# Altium PCB WPT Round 2 RX Layout.PcbDoc (part 1 of 2)
Units mm, origin at the board's own origin, x right, y up, seen from the top; angles counter-clockwise.
Board outline 85 x 80 mm, 4 copper layers (Top Layer, Ground 1, Ground 2, Bottom Layer), stack 0.603 mm thick; 127 components, 46 nets, 302 pads, 216 vias.
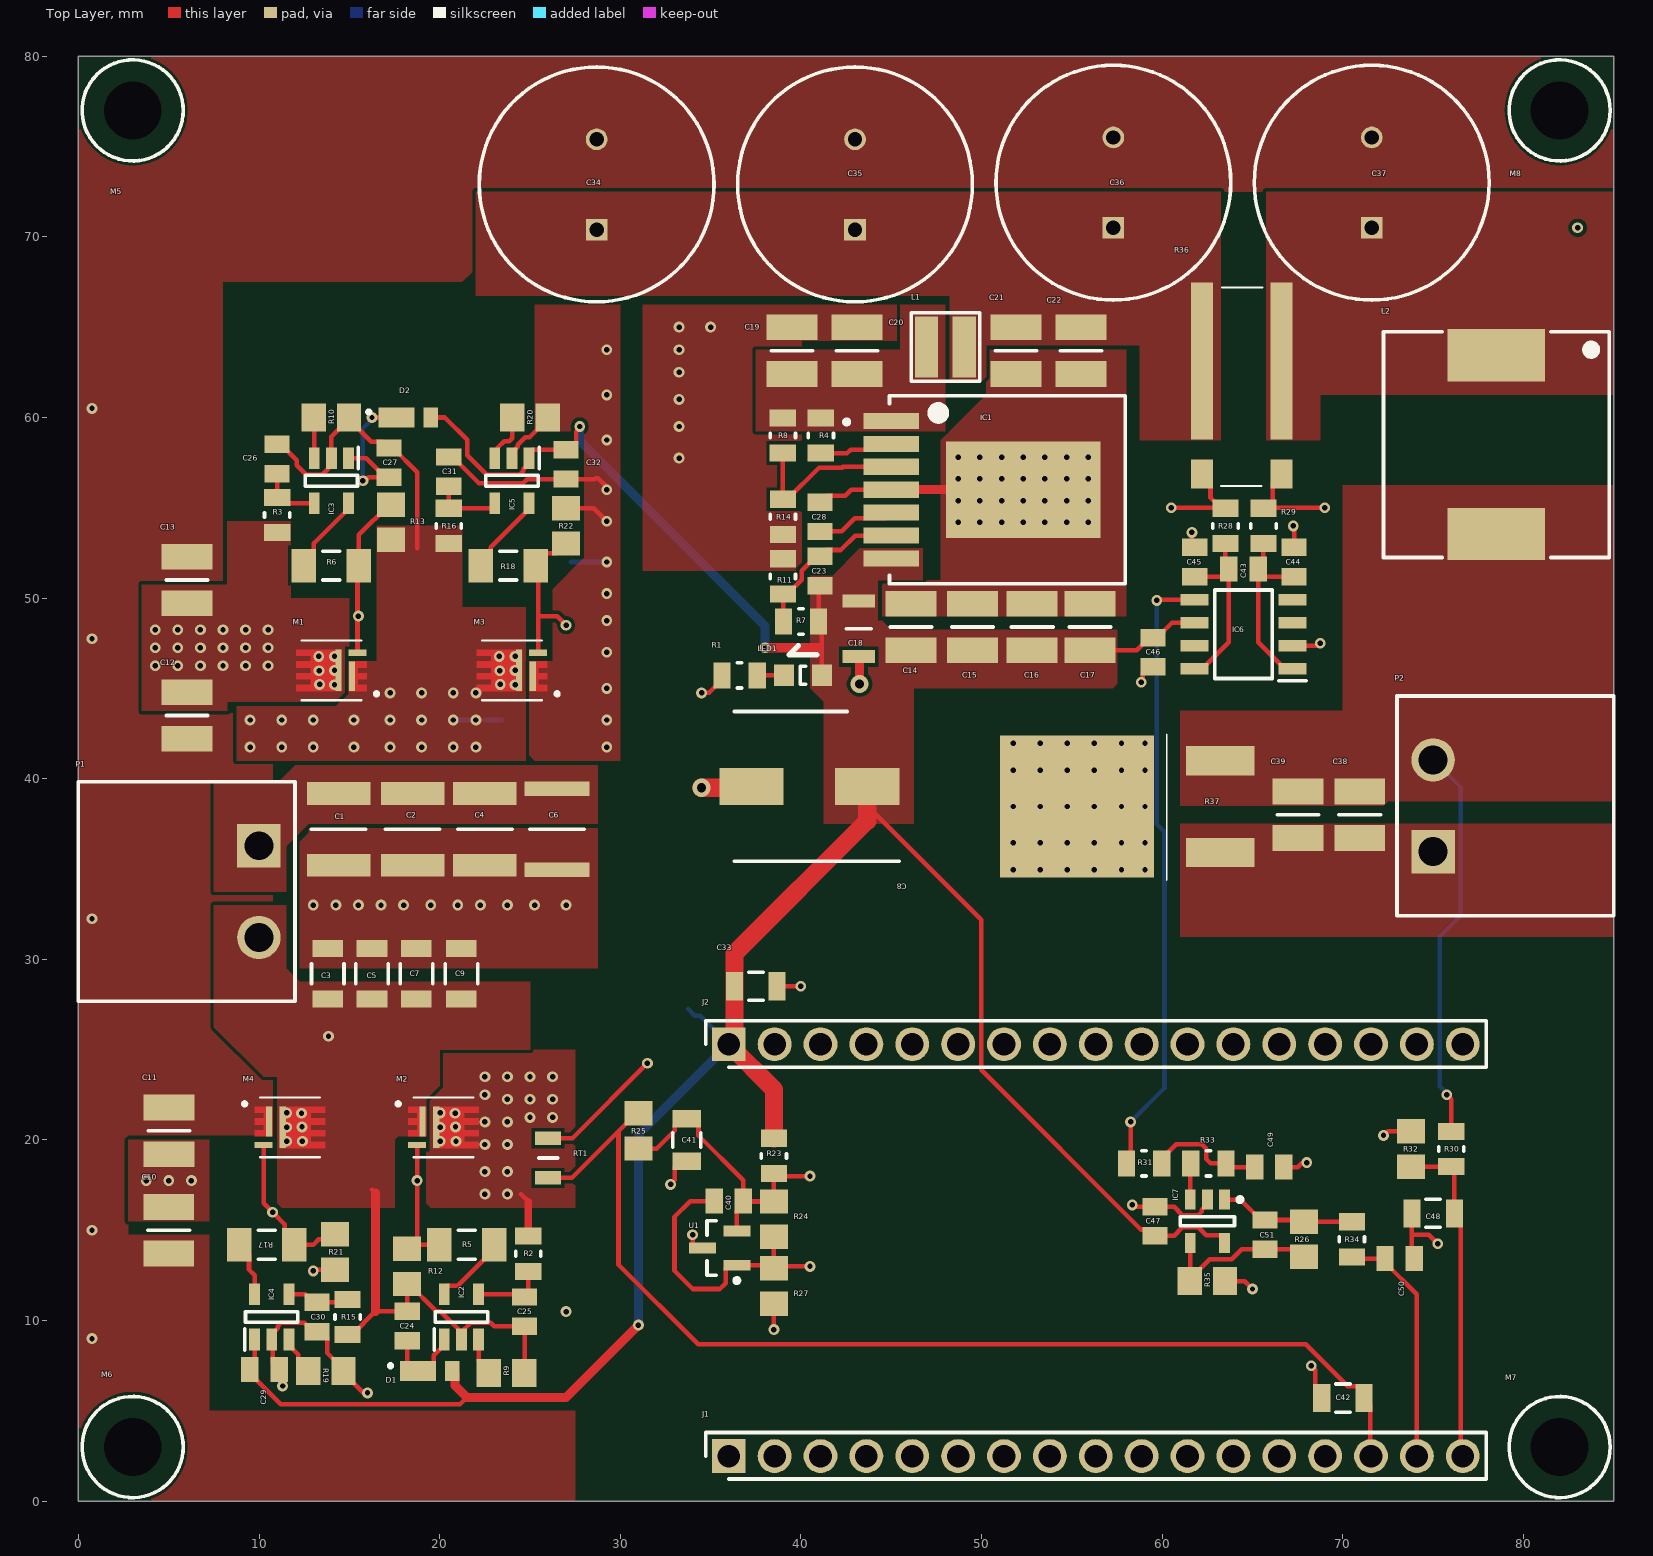
[diagram p0: Top Layer view]
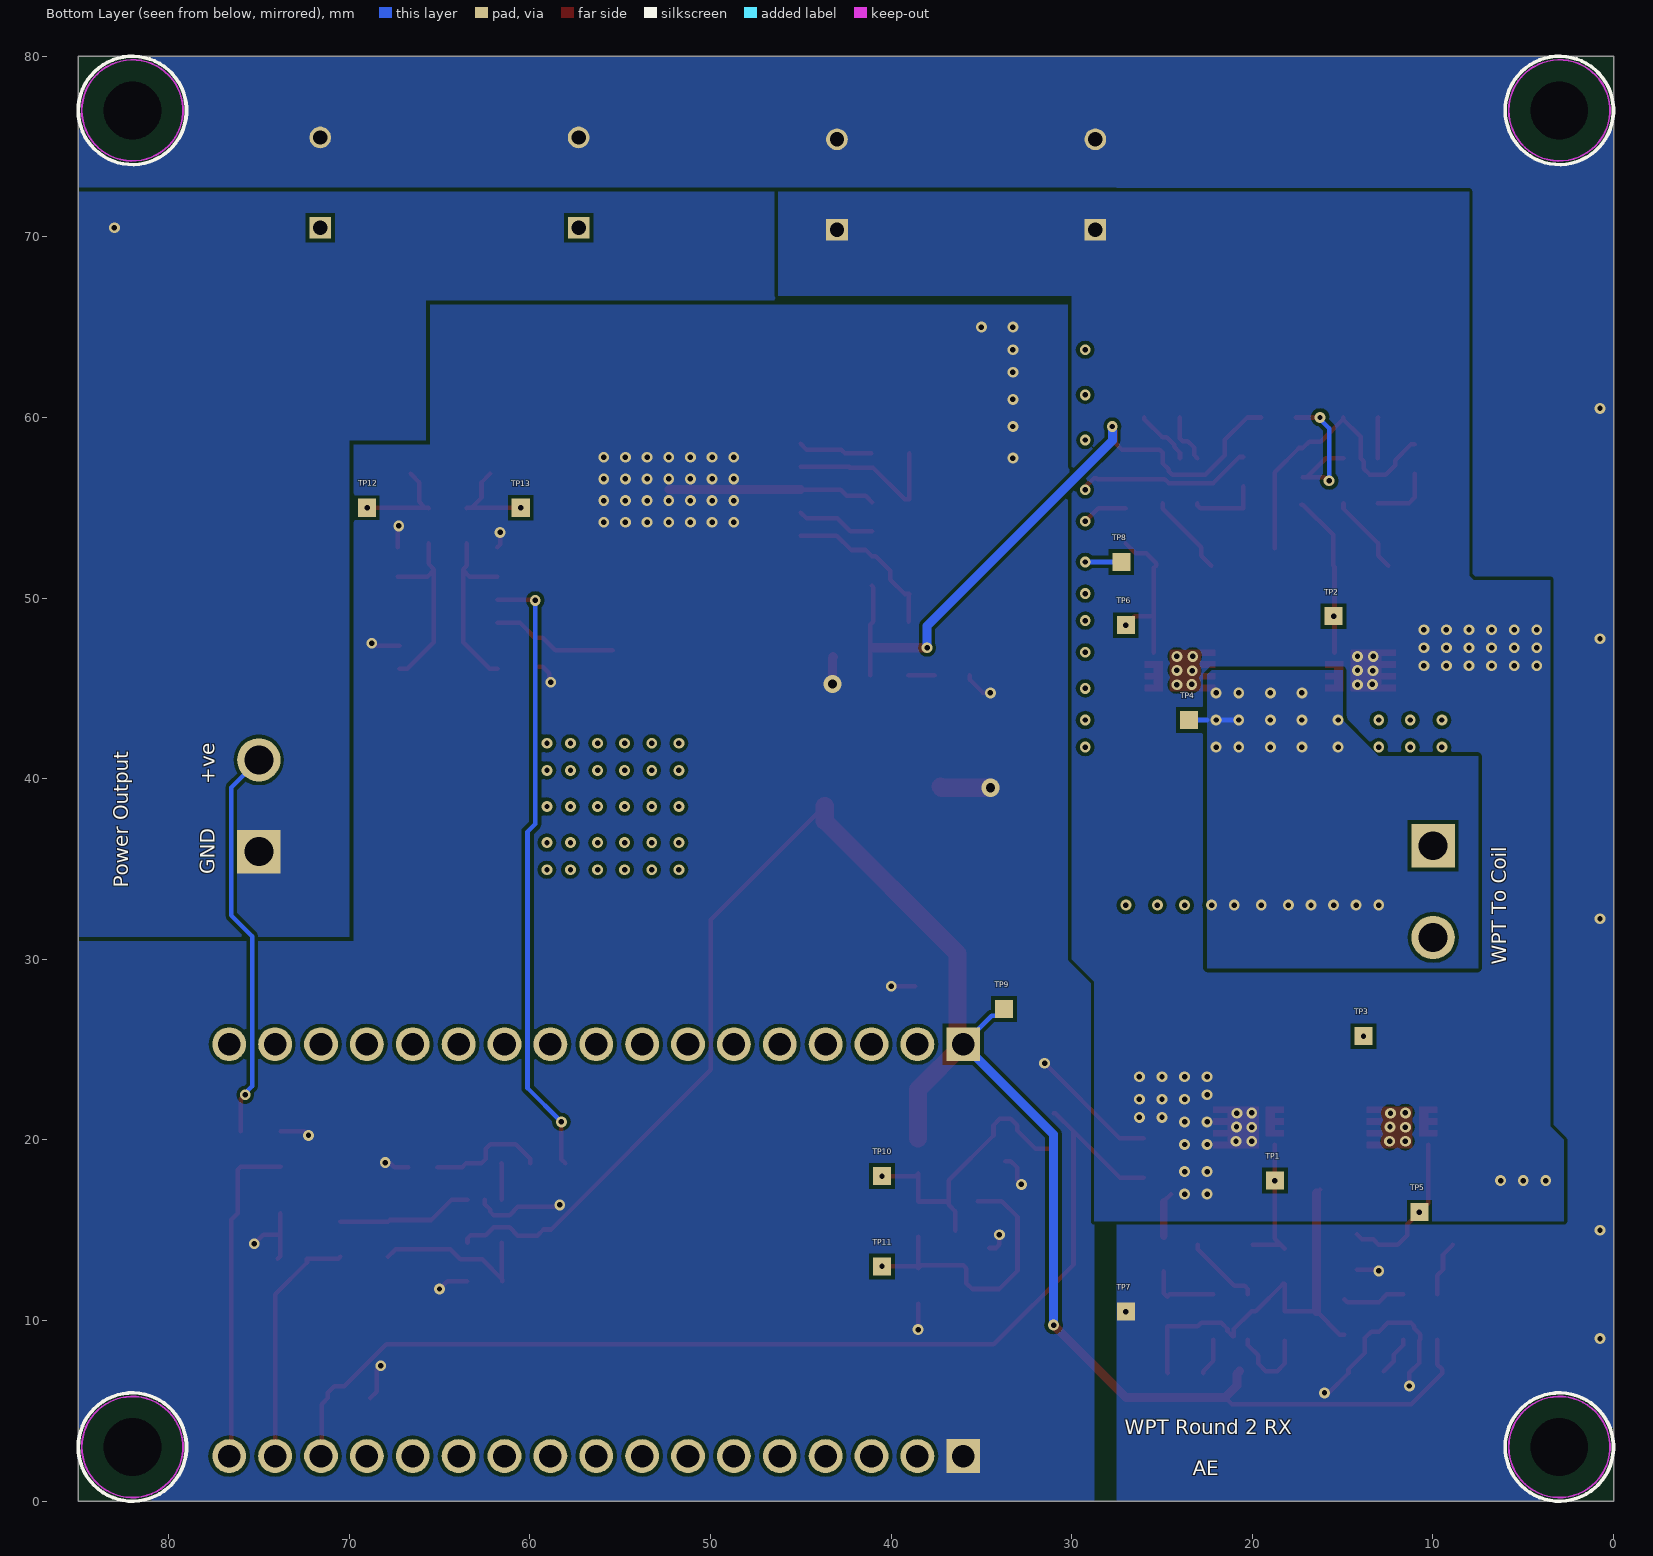
[diagram p1: Bottom Layer view, seen from below]
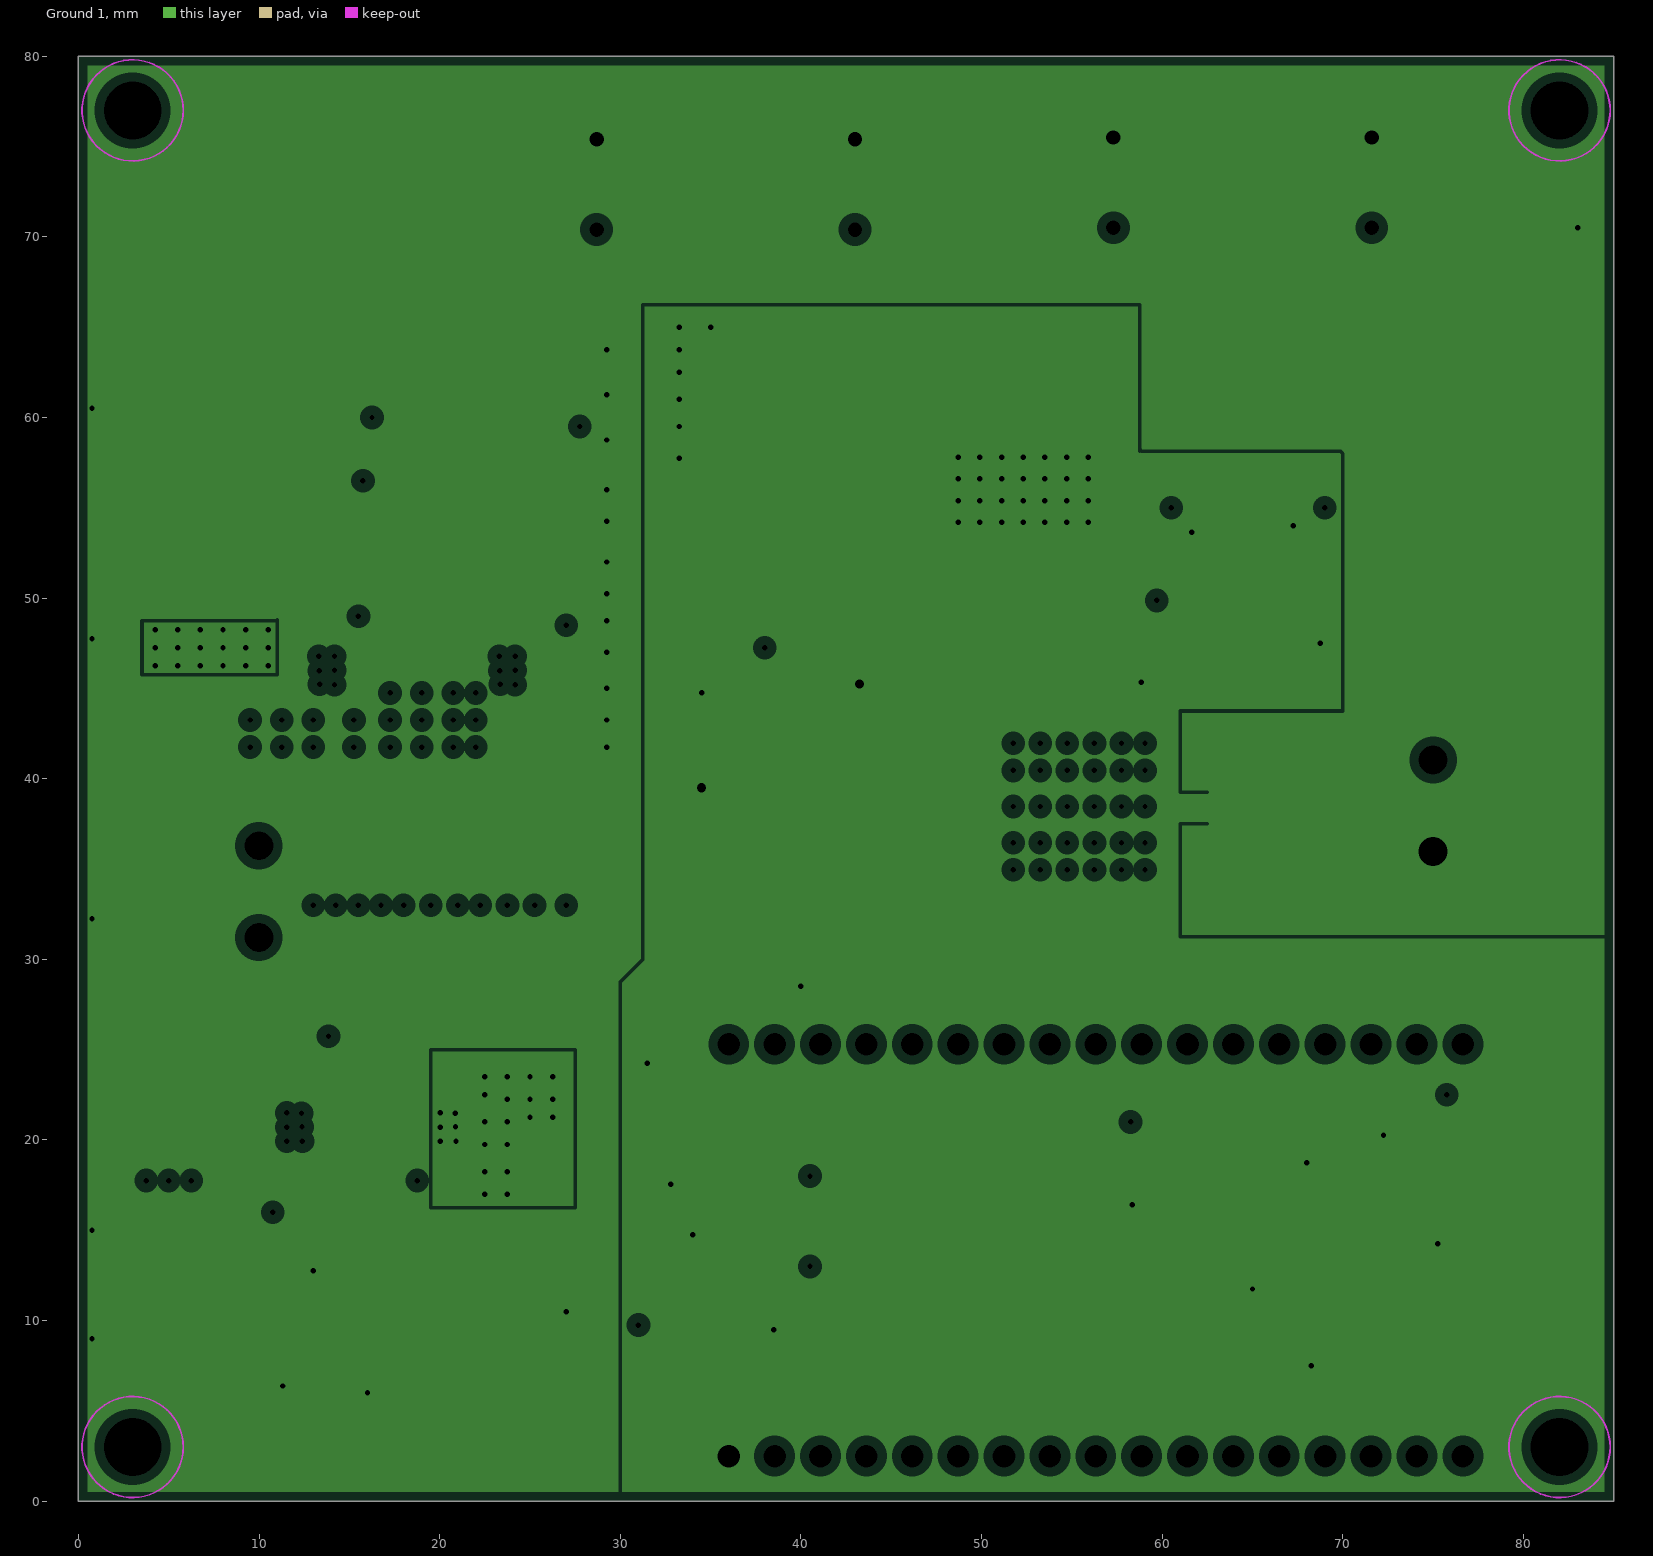
[diagram p2: Ground 1, clearances drawn from the general rule]
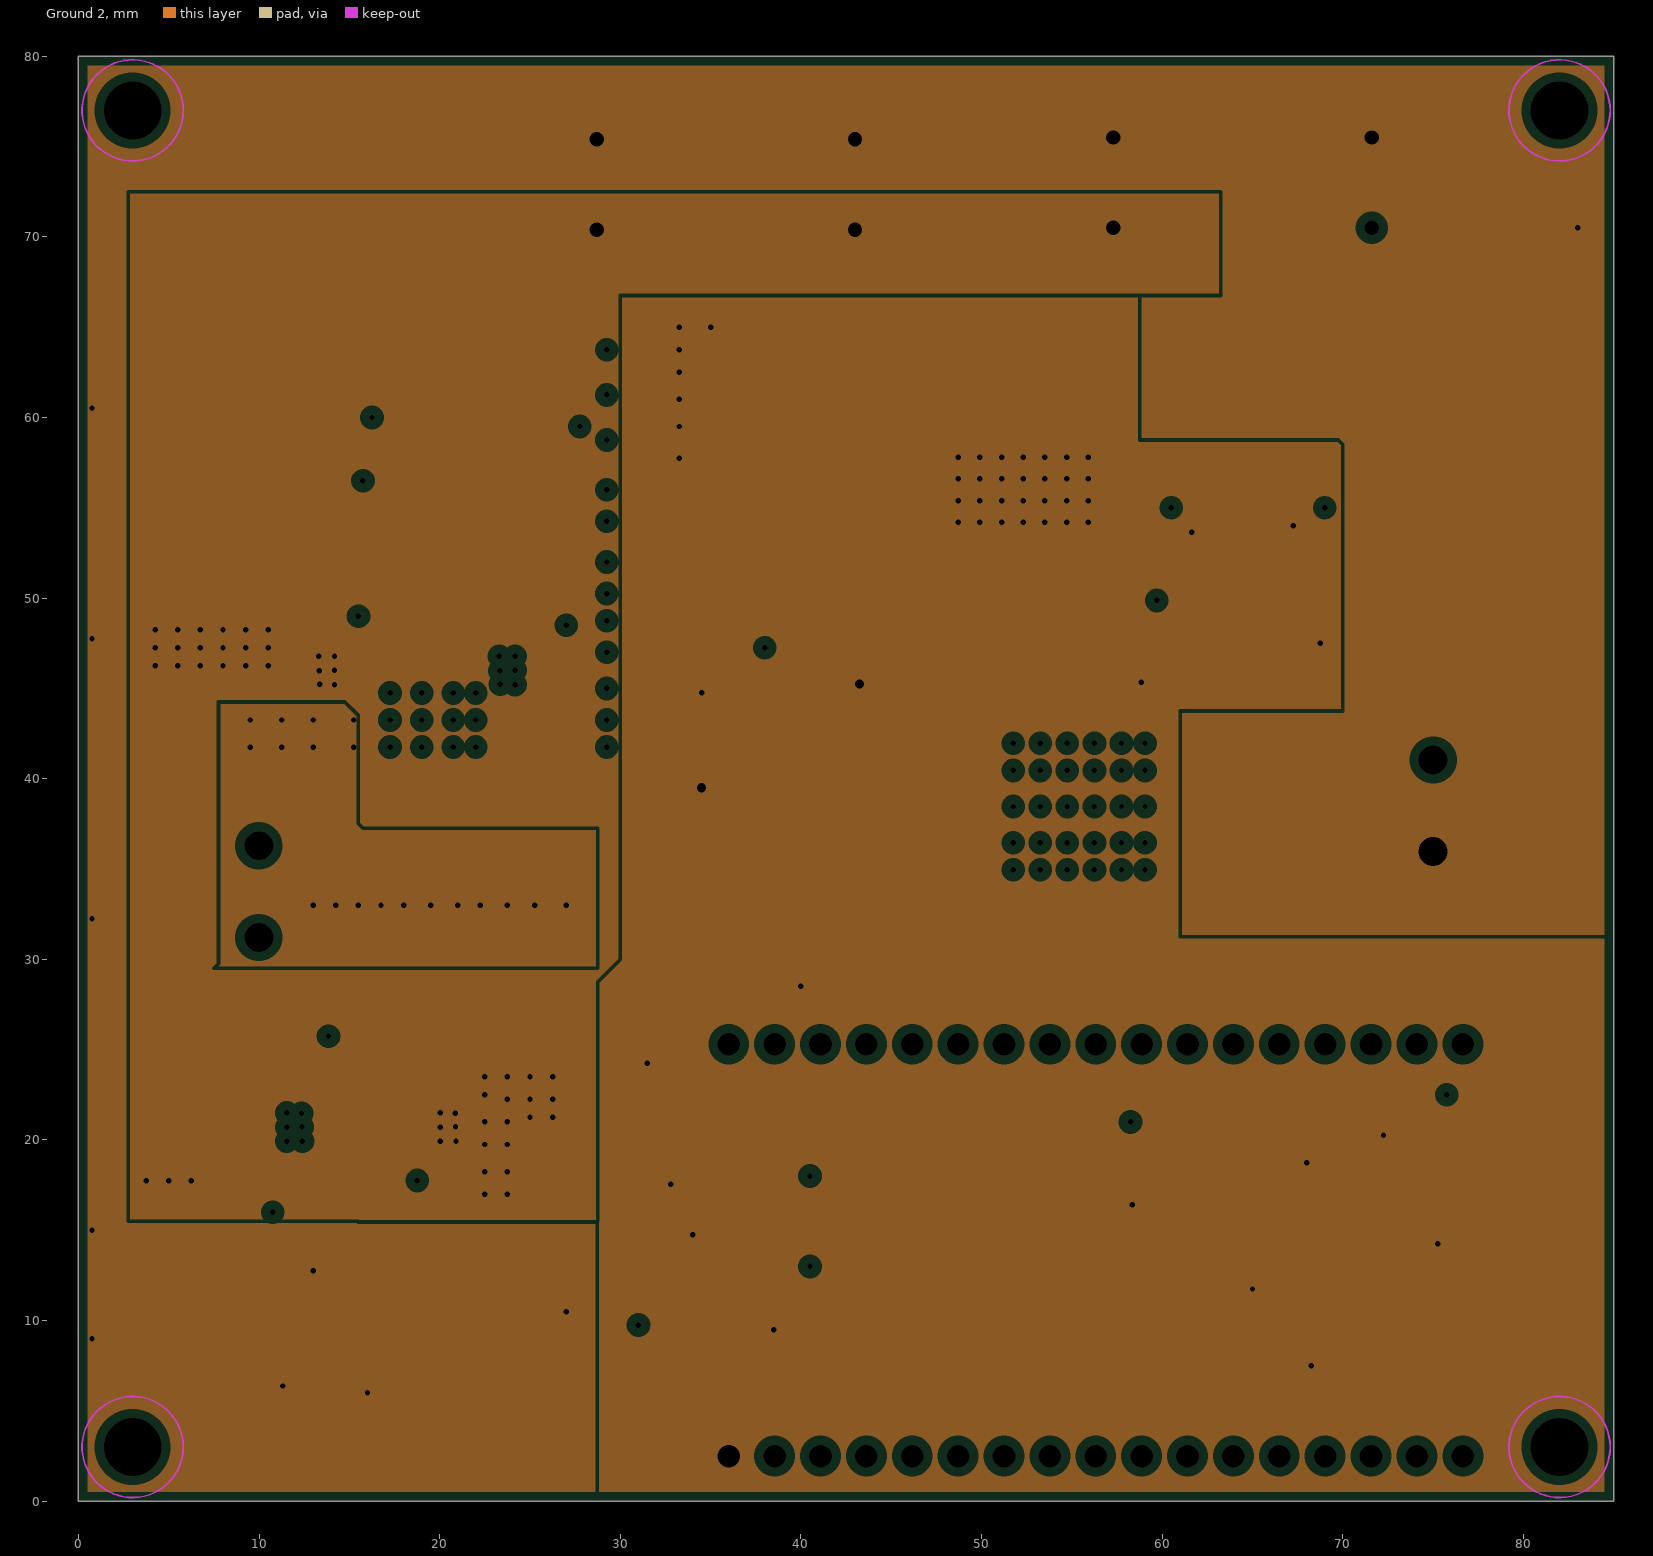
[diagram p3: Ground 2, clearances drawn from the general rule]
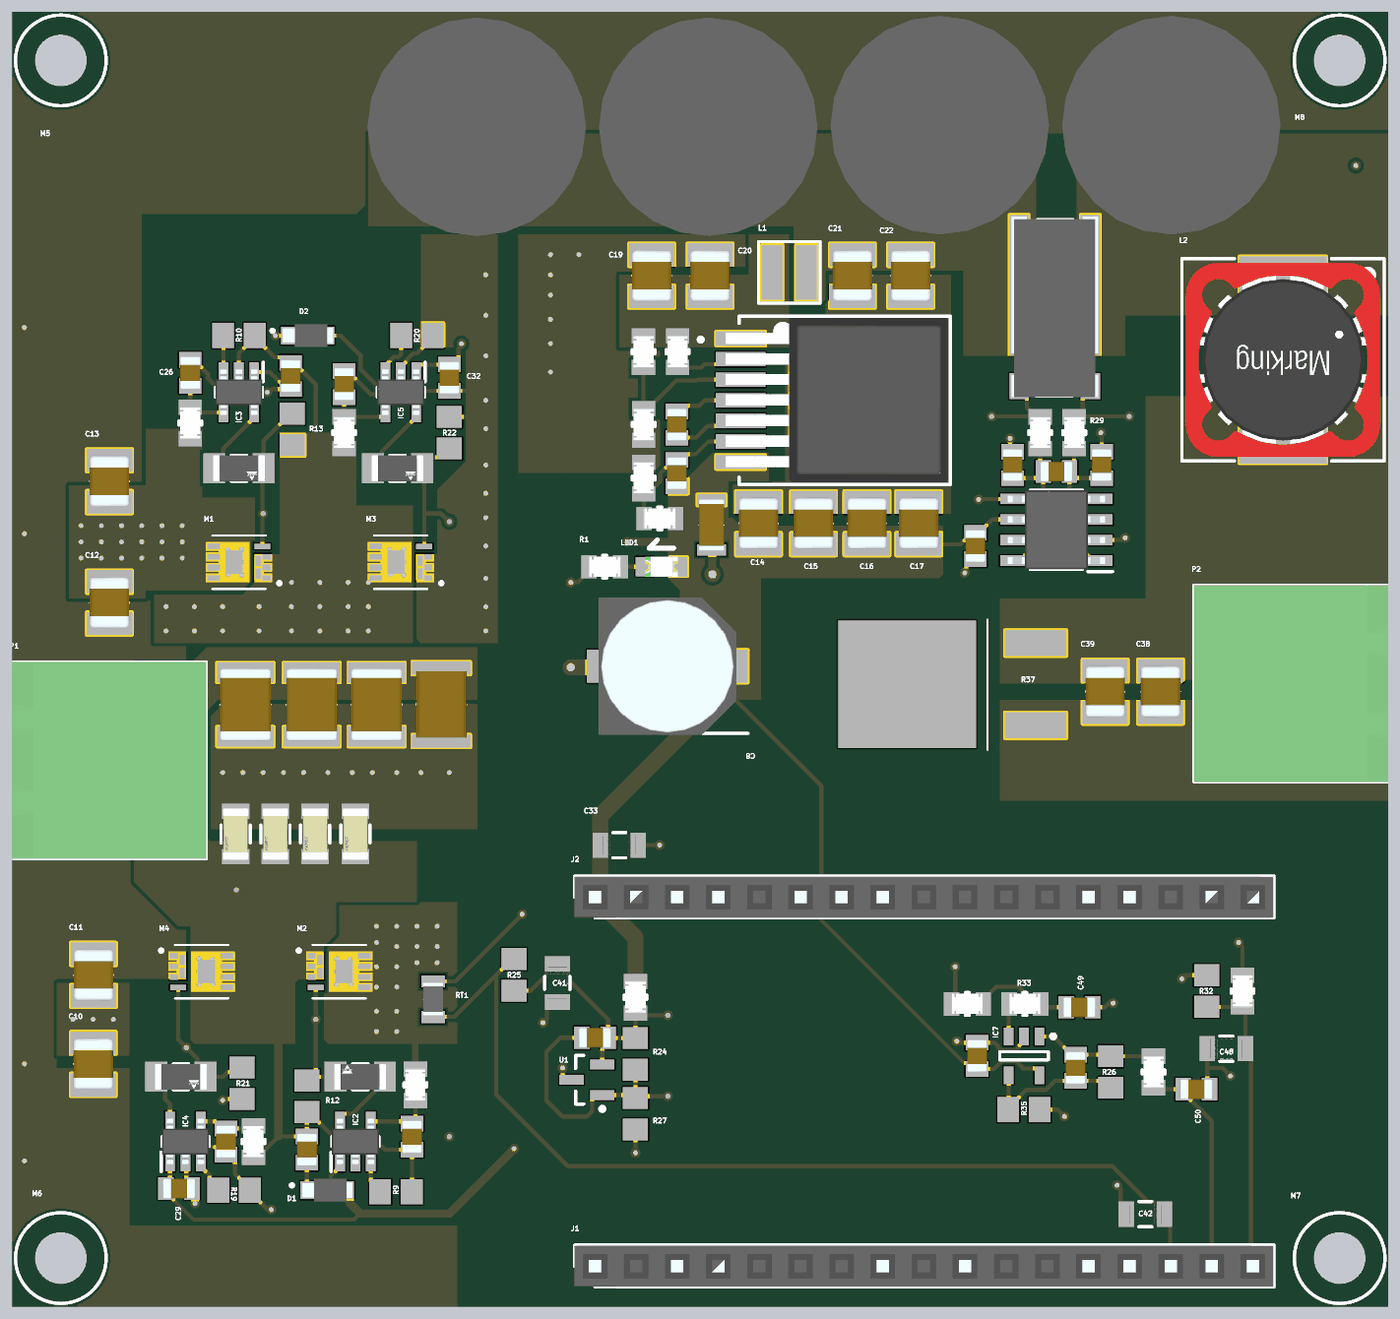
[diagram p4: 3D render of the assembled board from above, using the file's embedded part models]

## Layer stack, top to bottom
Top Solder: solder mask 0.0102, Solder Resist, Dk 3.5
Top Layer: signal copper 0.0356
Dielectric 2: prepreg 0.0711, PP-006, Dk 4.1
Ground 1: plane copper 0.035, net (Multiple Nets)
Dielectric 1: dielectric 0.32, FR-4, Dk 4.8
Ground 2: plane copper 0.035, net (Multiple Nets)
Dielectric 3: prepreg 0.0711, PP-006, Dk 4.1
Bottom Layer: signal copper 0.0356
Bottom Solder: solder mask 0.0102, Solder Resist, Dk 3.5

## Board outline
0,80 85,80 85,0 0,0

## Design rules (kind name [scope] priority, off if disabled: settings)
Clearance [All] p1: gap=0.2 ignorepadtopadclearanceinfootprint=TRUE
Height [All] p1: minheight=0 maxheight=50 prefheight=12.7
HoleSize [All] p1: absolutevalues=TRUE maxlimit=10 minlimit=0.025 maxpercent=80.000 minpercent=20.000
MinimumSolderMaskSliver [All] p1: minsoldermaskwidth=0.1
PlaneClearance [All] p1: clearance=0.508
PlaneConnect [All] p1: planeconnectstyle=Direct reliefexpansion=0.508 reliefentries=4 reliefconductorwidth=0.254 reliefairgap=0.254
PolygonConnect [All] p1: connectstyle=Direct reliefconductorwidth=0.254 reliefentries=4 polygonreliefangle="90 Angle" airgapwidth=0.254
RoutingVias [All] p1: holewidth=0.3 width=0.6 viastyle="Through Hole" minholewidth=0.05 minwidth=0.1 maxholewidth=0.711 maxwidth=1.27
SilkToSilkClearance [All] p1: silktosilkclearance=0.1
SilkToSolderMaskClearance [IsPad] p1: minsilkscreentomaskgap=0.1 clearancetoexposedcopper=TRUE
SolderMaskExpansion [All] p1: expansion=0.102 istentingtop=FALSE
Width [All] p1: maxlimit=10 minlimit=0.254 preferedwidth=0.254
23 further rules are at their usual default settings.

## Classes and differential pairs
net class Power: Vout

## Components (designator, comment, footprint, x,y, rotation, side; value= is the part's Value field where it differs from the comment)
C1 "100nF/250V" CAPC4532X220N 14.4,37.2 r270 top
C2 "100nF/250V" CAPC4532X220N 18.5,37.2 r270 top
C3 "470pF/200V" FP-C1206C-EB-MFG 13.8,29.2 r90 top value="470 pF"
C4 "100nF/250V" CAPC4532X220N 22.5,37.2 r270 top
C5 "470pF/200V" FP-C1206C-EB-MFG 16.254,29.2 r90 top value="470 pF"
C6 "47nF/250V" CAPC4532X350N 26.5,37.2 r270 top
C7 "470pF/200V" FP-C1206C-EB-MFG 18.709,29.2 r90 top value="470 pF"
C8 "68uF/25V" CAPAE830X1170N 40.471,39.571 r180 top
C9 "470pF/200V" FP-C1206C-EB-MFG 21.2,29.2 r90 top value="470 pF"
C10 "4.7uF/100VDC" CAPC3225X280N 5,15 r90 top
C11 "4.7uF/100VDC" CAPC3225X280N 5.02,20.5 r270 top
C12 "4.7uF/100VDC" CAPC3225X280N 6,43.5 r90 top
C13 "4.7uF/100VDC" CAPC3225X280N 6,51 r270 top
C14 "47uF/16V" CAPC3225X280N 46.1,48.4 r270 top
C15 "47uF/16V" CAPC3225X280N 49.5,48.4 r270 top
C16 "47uF/16V" CAPC3225X280N 52.8,48.4 r270 top
C17 "47uF/16V" CAPC3225X280N 56,48.4 r270 top
C18 "100nF/50V" CAPC3216X90N 43.2,48.3 r90 top
C19 "4.7uF/50V" CAPC3225X280N 39.5,63.7 r270 top
C20 "4.7uF/50V" CAPC3225X280N 43.1,63.7 r270 top
C21 "4.7uF/50V" CAPC3225X280N 51.9,63.7 r90 top
C22 "4.7uF/50V" CAPC3225X280N 55.5,63.7 r90 top
C23 "22nF/50V" CAPC2012X90N 41.054,51.5 r270 top
C24 "100nF/50V" CAPC2012X90N 18.2,9.7 r270 top
C25 "100pF" CAPC2012X70N 24.7,10.5 r90 top
C26 "100pF" CAPC2012X70N 11,57.7 r270 top
C27 "100nF/50V" CAPC2012X90N 17.2,57.5 r270 top
C28 "220nF/50V" CAPC2012X90N 41.054,54.5 r270 top
C29 "100nF/50V" CAPC2012X90N 10.3,7.3 r180 top
C30 "100pF" CAPC2012X70N 13.2,10.2 r90 top
C31 "100pF" CAPC2012X70N 20.5,57 r270 top
C32 "100nF/50V" CAPC2012X90N 27,57.4 r90 top
C33 "10nF/50V" "0805 Capacitor" 37.5,28.512 r180 top
C34 "1000uF/50V" CAPPRD500W62D1300H2650 28.687,70.4 r90 top
C35 "1000uF/50V" CAPPRD500W62D1300H2650 42.991,70.4 r90 top
C36 "1000uF/50V" CAPPRD500W62D1300H2650 57.296,70.5 r90 top
C37 "1000uF/50V" CAPPRD500W62D1300H2650 71.6,70.5 r90 top
C38 "4.7uF/50V" CAPC3225X280N 70.936,38 r90 top
C39 "4.7uF/50V" CAPC3225X280N 67.511,38 r90 top
C40 "1nF/50V" CAPC2012X90N 36,16.618 r180 top
C41 "10nF/50V" "0805 Capacitor" 33.673,20 r90 top
C42 "100nF/50V" "0805 Capacitor" 70,5.712 r0 top
C43 "1nF/50V" CAPC2012X90N 64.5,51.6 r180 top
C44 "1nF/50V" CAPC2012X90N 67.3,52 r270 top
C45 "1nF/50V" CAPC2012X90N 61.8,52 r270 top
C46 "100nF/50V" CAPC2012X90N 59.5,47 r90 top
C47 "100nF/50V" CAPC2012X90N 59.596,15.5 r270 top
C48 "10nF/50V" "0805 Capacitor" 75,15.938 r0 top
C49 "1nF/50V" CAPC2012X90N 65.924,18.5 r180 top
C50 "1nF/50V" CAPC2012X90N 73.144,13.43 r180 top
C51 "33pF/50V" CAPC2012X90N 65.679,14.76 r90 top
D1 "Schottky Diode" RB400VAM50TR 18.8,7.2 r270 top
D2 "Schottky Diode" RB400VAM50TR 17.6,60 r270 top
IC1 "171032401" "7 PIN PFM" 45,56 r0 top
IC2 "Gate Drive" SOT95P280X145-5N 21.2,10.2 r90 top
IC3 "Gate Drive" SOT95P280X145-5N 14,56.5 r270 top
IC4 "Gate Drive" SOT95P280X145-5N 10.7,10.2 r90 top
IC5 "Gate Drive" SOT95P280X145-5N 24,56.5 r270 top
IC6 "Amplifier" SOIC127P600X175-8N 64.5,48 r180 top
IC7 "Op-Amp" ADI-RJ-5_N 62.5,15.5 r270 top
J1 "01x17" RHDR17W76P0X254_1X17_4318X254X826P 36,2.5 r0 top
J2 "01x17" RHDR17W76P0X254_1X17_4318X254X826P 36,25.3 r0 top
L1 "10uH/1.2A" WE-MAPI_3020 48,63.9 r0 top
L2 "10A" WE-PF_1280 78.5,58.5 r180 top
LED1 "Green LED" 0805_A 40.106,45.72 r0 top
M1 "Mosfet" TRANS_BSZ037N06LS5ATMA1 14,46 r180 top
M2 "Mosfet" TRANS_BSZ037N06LS5ATMA1 20.2,20.7 r0 top
M3 "Mosfet" TRANS_BSZ037N06LS5ATMA1 24,46 r180 top
M4 "Mosfet" TRANS_BSZ037N06LS5ATMA1 11.7,20.7 r0 top
M5 "M3 Mounting Hole" "M3 Hole" 3,77 r0 top
M6 "M3 Mounting Hole" "M3 Hole" 3,3 r0 top
M7 "M3 Mounting Hole" "M3 Hole" 82,3 r0 top
M8 "M3 Mounting Hole" "M3 Hole" 82,77 r0 top
P1 "System Input" 691313510002 5.986,33.75 r270 top
P2 "System Output" 691313510002 79,38.5 r90 top
R1 "1K0O" FP-CRCW0805-e3-MFG 36.606,45.72 r180 top
R2 "1K" FP-CRCW0805-e3-MFG 24.9,13.7 r90 top
R3 "1K" FP-CRCW0805-e3-MFG 11,54.6 r270 top
R4 "100KO" FP-CRCW0805-e3-MFG 41.098,59 r90 top
R5 "10R" FP-CRCW1206-e3-IPC_A 21.5,14.2 r180 top
R6 "10R" FP-CRCW1206-e3-IPC_A 14,51.8 r0 top
R7 "6K8O" FP-CRCW0805-e3-MFG 40,48.7 r0 top
R8 "75KO" FP-CRCW0805-e3-MFG 38.994,59 r90 top
R9 "10k Ohm" "0805 RESISTOR" 23.7,7.1 r180 top
R10 "10k Ohm" "0805 RESISTOR" 14,60 r180 top
R11 "1K3O" FP-CRCW0805-e3-MFG 39,51.2 r270 top
R12 "10k Ohm" "0805 RESISTOR" 18.2,13 r270 top
R13 "10k Ohm" "0805 RESISTOR" 17.3,54.2 r270 top
R14 "15KO" FP-CRCW0805-e3-MFG 39,54.5 r90 top
R15 "1K" FP-CRCW0805-e3-MFG 14.9,10.2 r270 top
R16 "1K" FP-CRCW0805-e3-MFG 20.5,54 r270 top
R17 "10R" FP-CRCW1206-e3-IPC_A 10.417,14.2 r0 top
R18 "10R" FP-CRCW1206-e3-IPC_A 23.8,51.8 r0 top
R19 "10k Ohm" "0805 RESISTOR" 13.7,7.2 r180 top
R20 "10k Ohm" "0805 RESISTOR" 25,60 r180 top
R21 "10k Ohm" "0805 RESISTOR" 14.2,13.8 r270 top
R22 "10k Ohm" "0805 RESISTOR" 27,54 r90 top
R23 "1K" FP-CRCW0805-e3-MFG 38.5,19.118 r90 top
R24 "15K" "0805 RESISTOR" 38.5,15.618 r90 top
R25 "10k" "0805 RESISTOR" 31,20.5 r270 top
R26 "15K" "0805 Resistor" 67.85,14.5 r90 top
R27 "10K" "0805 RESISTOR" 38.5,11.918 r90 top
R28 "470R" FP-CRCW0805-e3-MFG 63.5,54 r90 top
R29 "470R" FP-CRCW0805-e3-MFG 65.604,54 r90 top
R30 "1M ohm" FP-CRCW0805-e3-MFG 76,19.5 r90 top
R31 "1K" FP-CRCW0805-e3-MFG 59,18.704 r180 top
R32 "56K" "0805 RESISTOR" 73.78,19.5 r270 top
R33 "6K8R" FP-CRCW0805-e3-MFG 62.554,18.704 r0 top
R34 "100R" FP-CRCW0805-e3-MFG 70.5,14.5 r90 top
R35 "10k Ohm" "0805 RESISTOR" 62.5,12.18 r0 top
R36 "0R005 5W" FC4L110R005FER 64.4,60 r180 top
R37 "300 Ohm / 25W" PWR163S253000FE 59.247,38.46 r90 top
RT1 "Thermistor 10K" THRMC2012X95N 26,19 r90 top
TP1 "TP" "Test Point" 18.75,17.75 r180 bottom
TP2 "TP" "Test Point" 15.5,49 r180 bottom
TP3 "TP" "Test Point" 13.842,25.746 r180 bottom
TP4 "TP" "Test Point" 23.5,43.25 r180 bottom
TP5 "TP" "Test Point" 10.75,16 r180 bottom
TP6 "TP" "Test Point" 27,48.5 r180 bottom
TP7 "TP" "Test Point" 27,10.5 r180 bottom
TP8 "TP" "Test Point" 27.25,52 r180 bottom
TP9 "TP" "Test Point" 33.75,27.25 r180 bottom
TP10 "TP" "Test Point" 40.5,18 r90 bottom
TP11 "TP" "Test Point" 40.5,13 r180 bottom
TP12 "TP" "Test Point" 69,55 r90 bottom
TP13 "TP" "Test Point" 60.5,55 r90 bottom
U1 "Shunt Voltage Reference Diode" SOT23-3_N 35.5,14.018 r180 top

## Footprints (in the part's own frame and the unit in brackets; to place one, negate y for a bottom-side part, rotate by r counter-clockwise, add the part's x,y. Pads: shape width x height; smd on the part's side, far side on the other; paste and mask are expansions set on the pad)
"7 PIN PFM" [mm] "SMD, 7-Leads, Body 10.4x10.1mm (max), Pitch 1.27mm, IPC Medium Density"
  rect 3.06x0.89 smd: 1(0,3.81) 2(0,2.54) 3(0,1.27) 4(0,0) 5(0,-1.27) 6(0,-2.54) 7(0,-3.81)
  rect 8.54x5.35 smd: 8(7.305,0)
  silkscreen extent -2.6,-5.2 12.95,5.2, body extent -0.93,-5.06 12.84,5.1, height 4.72
"0805 Capacitor" [mm]
  rect 0.956x1.556 smd paste+0 mask+0: 1(-1.175,0) 2(1.175,0)
  silkscreen extent -0.4,-0.78 0.4,0.78, body extent -2.15,-1.28 2.15,1.28, height 0.25
"0805 RESISTOR" [mm] "Chip Resistor, 2-Leads, Body 2.00x1.25mm, IPC Low Density"
  rect 1.35x1.55 smd: 1(-0.975,0) 2(0.975,0)
  body extent -1.1,-0.72 1.1,0.72, height 0.7
"0805 Resistor" [mm] "Chip Resistor, 2-Leads, Body 2.00x1.25mm, IPC Low Density"
  rect 1.35x1.55 smd: 1(-0.975,0) 2(0.975,0)
  body extent -1.1,-0.72 1.1,0.72, height 0.7
0805_A [mm] "Chip LED, 2-Leads, Body 2.0x1.3mm, IPC Medium Density"
  rect 1.1x1.2 smd: 1(-1.05,0) 2(1.05,0)
  silkscreen extent -0.76,-0.5 0.76,1.65, body extent -1,-0.62 1,0.63, height 0.68
691313510002 [mm] "5,08mm - PCB Headers - Horizontal - Closed ends - 02p"
  rect 2.4x2.4 hole 1.6: 1(-2.54,4)
  round 2.4 hole 1.6: 2(2.54,4)
  silkscreen extent -6.08,-6 6.08,6, body extent -6.08,-6 6.08,6, height 8.55
ADI-RJ-5_N [mm] "SOT-23, 5-Leads, Body 2.9x1.6mm, Pitch 0.95mm, IPC Medium Density"
  rect 1.1x0.6 smd: 1(-1.2,0.95) 2(-1.2,0) 3(-1.2,-0.95) 4(1.2,-0.95) 5(1.2,0.95)
  silkscreen extent -1.32,-1.5 0.25,1.93, body extent -0.85,-1.5 0.85,1.5, height 1.45
CAPAE830X1170N [mm]
  rect 3.55x2.05 smd: 1(-3.2,0) 2(3.2,0)
  silkscreen extent -4.97,-4.15 4.15,4.15, body extent -4.25,-4.25 4.25,4.25, height 11.7
CAPC2012X70N [mm]
  rect 0.96x1.39 smd: 1(-0.81,0) 2(0.81,0)
  body extent -1,-0.63 1,0.63, height 0.7
CAPC2012X90N [mm]
  rect 0.96x1.39 smd: 1(-0.81,0) 2(0.81,0)
  body extent -1,-0.63 1,0.63, height 0.9
CAPC3216X90N [mm]
  rect 0.71x1.78 smd: 1(-1.54,0) 2(1.54,0)
  silkscreen extent 0,-0.7 0,0.7, body extent -1.6,-0.8 1.6,0.8, height 0.9
CAPC3225X280N [mm]
  rect 1.43x2.82 smd: 1(-1.29,0) 2(1.29,0)
  silkscreen extent 0,-1.15 0,1.15, body extent -1.6,-1.25 1.6,1.25, height 2.8
CAPC4532X220N [mm]
  rect 1.25x3.52 smd: 1(-1.98,0) 2(1.98,0)
  silkscreen extent 0,-1.5 0,1.5, body extent -2.25,-1.6 2.25,1.6, height 2.2
CAPC4532X350N [mm]
  rect 0.81x3.61 smd: 1(-2.25,0) 2(2.25,0)
  silkscreen extent 0,-1.5 0,1.5, body extent -2.05,-1.57 2.05,1.57, height 3.46
CAPPRD500W62D1300H2650 [mm]
  rect 1.2x1.2 hole 0.8: 1(0,0)
  round 1.2 hole 0.8: 2(5,0)
  silkscreen extent -4,-6.5 9,6.5, body extent -4.25,-6.75 9.25,6.75, height 26.5
FC4L110R005FER [mm]
  rect 1.2x8.7 smd: 1(-2.2,-3.125) 2(2.2,-3.125)
  rect 1.2x1.6 smd: 3(2.2,3.125) 4(-2.2,3.125)
  silkscreen extent -1.15,-7.2 1.15,3.8, body extent -2.68,-7.35 2.68,3.8, height 0.8
FP-C1206C-EB-MFG [mm]
  rect 0.95x1.7 smd paste+0 mask+0: 1(-1.4,0) 2(1.4,0)
  silkscreen extent -0.55,-0.9 0.55,0.9, body extent -2,-1 2,1, height 0.25
FP-CRCW0805-e3-MFG [mm]
  rect 0.95x1.45 smd paste+0 mask+0: 1(-0.975,0) 2(0.975,0)
  silkscreen extent -0.13,-0.7 0.13,0.7, body extent -1.55,-0.82 1.55,0.82, height 0.25
FP-CRCW1206-e3-IPC_A [mm]
  rect 1.356x1.858 smd paste+0 mask+0: 1(-1.526,0) 2(1.526,0)
  silkscreen extent -0.47,-0.8 0.47,0.8, body extent -2.7,-1.43 2.7,1.43, height 0.25
"M3 Hole" [mm]
  round 0 hole 3.2 unplated mask+0.1: 1(0,0)
  Keep-Out Layer circle w0.1: c0,0 r2.8
  silkscreen extent -2.8,-2.8 2.8,2.8
PWR163S253000FE [mm]
  rect 1.62x3.81 smd: 1(-2.54,-3.97) 2(2.54,-3.97)
  rect 7.87x8.51 smd: 3(0,3.97)
  silkscreen extent -4.07,-1 4,-1
RB400VAM50TR [mm]
  rect 1.1x2 smd: 1(0,0)
  rect 1.1x0.8 smd: 2(0,1.9)
  silkscreen extent -0.4,-1.62 -0.2,-1.43, body extent -0.7,-0.89 0.7,2.22, height 0.9
RHDR17W76P0X254_1X17_4318X254X826P [mm]
  rect 1.875x1.875 hole 1.25: 1(0,0)
  round 1.875 hole 1.25: 2(2.54,0) 3(5.08,0) 4(7.62,0) 5(10.16,0) 6(12.7,0) 7(15.24,0) 8(17.78,0) 9(20.32,0) 10(22.86,0) 11(25.4,0) 12(27.94,0) 13(30.48,0) 14(33.02,0) 15(35.56,0) 16(38.1,0) 17(40.64,0)
  silkscreen extent -1.27,-1.27 41.95,1.31, body extent -1.27,-1.27 41.91,1.27, height 8.26
SOIC127P600X175-8N [mm]
  rect 1.525x0.65 smd: 1(-2.712,1.905) 2(-2.712,0.635) 3(-2.712,-0.635) 4(-2.712,-1.905) 5(2.712,-1.905) 6(2.712,-0.635) 7(2.712,0.635) 8(2.712,1.905)
  silkscreen extent -3.47,-2.45 1.6,2.58, body extent -3,-2.45 3,2.45, height 1.75
SOT23-3_N [mm] "SOT23, 3-Leads, Body 2.9x1.3mm, Pitch 0.95mm, Lead Span 2.4mm, IPC Medium Density"
  rect 1.5x0.6 smd: 1(-0.95,0.95) 2(-0.95,-0.95) 3(0.95,0)
  silkscreen extent -1.07,-1.5 0.7,1.92, body extent -0.7,-1.52 0.7,1.52, height 1.12
SOT95P280X145-5N [mm]
  rect 1.2x0.6 smd: 1(-1.25,0.95) 2(-1.25,0) 3(-1.25,-0.95) 4(1.25,-0.95) 5(1.25,0.95)
  silkscreen extent -1.85,-1.45 0.3,1.5, body extent -1.4,-1.45 1.4,1.45, height 1.45
"Test Point" [mm]
  rect 1x1 smd: 1(0,0)
THRMC2012X95N [mm]
  rect 0.75x1.45 smd: 1(-1.1,0) 2(1.1,0)
  silkscreen extent 0,-0.53 0,0.53, body extent -1,-0.63 1,0.63, height 0.95
TRANS_BSZ037N06LS5ATMA1 [mm]
  rect 0.34x1.64 smd paste-2 mask+0: 1-2-3(-1.15,0.325)
  rect 1x0.34 smd: 4(-1.45,-0.975)
  rect 0.34x2.29 smd paste-2 mask+0: 5-6-7-8(-0.39,0)
  Top Layer region: 1.95,0.805 1.15,0.805 1.15,0.495 1.95,0.495 1.95,0.155 1.15,0.155 1.15,-0.155 1.95,-0.155 1.95,-0.495 1.15,-0.495 1.15,-0.805 1.95,-0.805 1.95,-1.145 -0.56,-1.145 -0.56,1.145 1.95,1.145
  Top Layer region: -0.95,-0.495 -1.95,-0.495 -1.95,-0.155 -1.45,-0.155 -1.45,0.155 -1.95,0.155 -1.95,0.495 -1.45,0.495 -1.45,0.805 -1.95,0.805 -1.95,1.145 -0.95,1.145
  silkscreen extent -2.6,-1.65 1.65,1.65
WE-MAPI_3020 [mm]
  rect 1.3x3.4 smd: 1(-1.05,0) 2(1.05,0)
  silkscreen extent -1.9,-1.9 1.9,1.9
WE-PF_1280 [mm] "SMD EMI Suppression Power  Ferrite, body 12x12mm"
  rect 5.4x2.9 smd: 1(0,-4.95) 2(0,4.95)
  silkscreen extent -6.25,-6.25 6.25,6.25, body extent -6,-6 6,6, height 8

## Part data
C1 C2 C4: library part C1812C104JAGACAUTO, Manufacturer_Name=Kemet, Supplier Part Number 1=80-C1812C104JAGAUTO, Datasheet Link=https://api.kemet.com/component-edge/download/datasheet/C1812C104JAGACAUTO.pdf, Height=2.2mm, Manufacturer_Part_Number=C1812C104JAGACAUTO, Supplier 1=Mouser
C3 C5 C7 C9: library part C1206C471K2GACTU, "CAP CER 470PF 200V 10% NP0 1206", Capacitance="470 pF", Manufacturer=KEMET, Package=C1206C-EB, Temperature="-55°C to +150°C", Temperature Characteristic=C0G, Temperature Coefficient=15%, Temperature Range High=+150°C, Temperature Range Low=-55°C, Tolerance=0.1, Voltage Rating="200 V", Automotive=Yes, Automotive Grade="Grade 0", Category=Cap, ComponentLink2Description=Datasheet, ComponentLink2URL=https://content.kemet.com/datasheets/KEM_C1007_X8R_ULTRA_150C_SMD.pdf, Device Class L1="Passive Components", Device Class L2=Capacitors, Device Class L3="Ceramic Capacitors", Digikey Description="CAP CER 470PF 200V 10% NP0 1206", Height=0.88mm, Ipc Land Pattern Name=CAPC320160X78, Lead Free=Yes, Manufacturer Part Number=C1206C471K2GACTU, Material=Ceramic, Mouser Description="Multilayer Ceramic Capacitors MLCC - SMD/SMT 200volts 470pF C0G 10%", Octopart=https://octopart.com/c1206c471k2gactu-kemet-3658280, RoHS=TRUE
C6: library part C4532C0G2E473J320KA, "Capacitor / 47nF/250V  / C0G", Manufacturer_Name=TDK, Supplier Part Number 1=810-C4532C0G2E473J, Datasheet Link=https://product.tdk.com/info/en/catalog/datasheets/mlcc_commercial_midvoltage_en.pdf, Height=3.5mm, Manufacturer_Part_Number=C4532C0G2E473J320KA, Supplier 1=Mouser
C8: library part 875075555003, "Capacitor Polarised", Manufacturer_Name="Wurth Elektronik", Supplier Part Number 1=710-875075555003, Datasheet Link=http://katalog.we-online.com/pbs/datasheet/875075555003.pdf, Height=11.7mm, Manufacturer_Part_Number=875075555003, Supplier 1=Mouser
C10 C11 C12 C13: library part CNC6P1X7R2A475K250AE, Manufacturer_Name=TDK, Mouser2 Part Number=810-CNC6P1X7R2A475K2, Datasheet Link=https://componentsearchengine.com//CNC6P1X7R2A475K250AE.pdf, Height=2.8mm, Manufacturer_Part_Number=CNC6P1X7R2A475K250AE, Mouser2 Price/Stock=https://www.mouser.com/Search/Refine.aspx?Keyword=810-CNC6P1X7R2A475K2, Supplier 1=Mouser, Supplier Part Number 1=810-CNC6P1X7R2A475K2
C14 C15 C16 C17: library part EMK325ABJ476MMHP, "Capacitor 47uF/16V", Supplier Part Number 1=963-EMK325ABJ476MMHP, Supplier 1=Mouser
C18: library part 885012208087, "Capacitor 100nF/50V", Manufacturer_Name="Wurth Elektronik", Mouser2 Part Number=710-885012208087, Datasheet Link=https://componentsearchengine.com//885012208087.pdf, Height=0.9mm, Manufacturer_Part_Number=885012208087, Mouser2 Price/Stock=https://www.mouser.com/Search/Refine.aspx?Keyword=710-885012208087, Supplier 1=Mouser, Supplier Part Number 1=710-885012208087
C19 C20 C21 C22 C38 C39: library part 885012209048, "Capacitor 4.7uF/50V", Manufacturer_Name="Wurth Elektronik", Supplier Part Number 1=710-885012209048, Datasheet Link=https://katalog.we-online.com/pbs/datasheet/885012209048.pdf, Height=2.8mm, Manufacturer_Part_Number=885012209048, Supplier 1=Mouser
C23: library part 885012207094, "Capacitor 22nF/50V", Manufacturer_Name="Wurth Elektronik", Mouser2 Part Number=710-885012207094, Datasheet Link=https://componentsearchengine.com//885012207094.pdf, Height=0.9mm, Manufacturer_Part_Number=885012207094, Mouser2 Price/Stock=https://www.mouser.com/Search/Refine.aspx?Keyword=710-885012207094, Supplier 1=Mouser, Supplier Part Number 1=710-885012207094
C24 C27 C29 C32: library part 885012207098, "Capacitor 100nF/50V", Manufacturer_Name="Wurth Elektronik", Mouser2 Part Number=710-885012207098, Datasheet Link=https://componentsearchengine.com//885012207098.pdf, Height=0.9mm, Manufacturer_Part_Number=885012207098, Mouser2 Price/Stock=https://www.mouser.com/Search/Refine.aspx?Keyword=710-885012207098, Supplier 1=Mouser, Supplier Part Number 1=710-885012207098
C25 C26 C30 C31: library part 885012007057, "Capacitor 100pF", Manufacturer_Name="Wurth Elektronik", Supplier Part Number 1=710-885012007057, Datasheet Link=https://katalog.we-online.com/pbs/datasheet/885012007057.pdf, Height=0.7mm, Manufacturer_Part_Number=885012007057, Supplier 1=Mouser
C28: library part 885012207100, "Capacitor 220nF / 50V", Supplier Part Number 1=710-885012207100, Supplier 1=Mouser
C33 C41 C48: library part 885012207092, Supplier Part Number 1=710-885012207092, Supplier 1=Mouser
C34 C35 C36 C37: library part ESH108M050AL4AA, "Capacitor 1000uF", Supplier Part Number 1=80-ESH108M050AL4AA, Supplier 1=Mouser
C40 C43 C44 C45 C49 C50: library part 885012207086, Manufacturer_Name="Wurth Elektronik", Supplier Part Number 1=710-885012207086, Datasheet Link=https://katalog.we-online.com/pbs/datasheet/885012207086.pdf, Height=0.9mm, Manufacturer_Part_Number=885012207086, Supplier 1=Mouser
C42: library part 885012207098, Supplier Part Number 1=710-885012207098, Supplier 1=Mouser
C46 C47: library part 885012207098, Manufacturer_Name="Wurth Elektronik", Supplier Part Number 1=710-885012207098, Height=0.9mm, Supplier 1=Mouser
C51: library part C0805C330J5GACTU, "Capacitor 33pF/50V", Manufacturer_Name=Kemet, Supplier Part Number 1=80-C0805C330J5G, Manufacturer_Part_Number=C0805C330J5GACTU, Supplier 1=Mouser
D1 D2: library part RB400VAM-50TR, Manufacturer_Name="ROHM Semiconductor", Mouser2 Part Number=755-RB400VAM-50TR, Datasheet Link=https://componentsearchengine.com//RB400VAM-50TR.pdf, Height=0.8mm, Manufacturer_Part_Number=RB400VAM-50TR, Mouser2 Price/Stock=https://www.mouser.com/Search/Refine.aspx?Keyword=755-RB400VAM-50TR, Supplier 1=Mouser, Supplier Part Number 1=755-RB400VAM-50TR
IC1: "MagI³C-VDRM Variable Step Down Regulator Module WE-VDRM , Ui=6-42V", Manufacturer="Wuerth Elektronik", Supplier Part Number 1=710-171032401, ComponentLink1Description="Manufacturer URL", ComponentLink1URL=http://www.we-online.com, ComponentLink2Description=Datasheet, ComponentLink2URL=http://katalog-live.we-online.de/pm/datasheet/171032401.pdf, PackageReference="7 PIN PFM", PartNumber=171032401, Supplier 1=Mouser, Ui="6-42 V"
IC2 IC3 IC4 IC5: library part IR1161LTRPBF, "Gate Driver IC", Manufacturer_Name=Infineon, Supplier Part Number 1=942-IR1161LTRPBF, Height=1.45mm, Manufacturer_Part_Number=IR1161LTRPBF, Supplier 1=Mouser
IC6: library part AD8215YRZ, "Integrated Circuit Amplifier", Manufacturer_Name="Analog Devices", Supplier Part Number 1=584-AD8215YRZ, Datasheet Link=http://www.analog.com/static/imported-files/data_sheets/AD8215.pdf, Height=1.75mm, Manufacturer_Part_Number=AD8215YRZ, Supplier 1=Mouser
IC7: library part AD8031ARTZ-REEL7, "Single Channel RRIO Operational Amplifier, 80 MHz BW, 35 V/us SR, Industrial, 5-pin SOT23 (RJ-5), Reel", Amplifiers Per Package=1, Generic Part Number=AD8031, Input Bias Current=450nA, Input Offset Voltage=1mV, Manufacturer="Analog Devices", Supplier Part Number 1=584-AD8031ARTZ-R7, Code_JEDEC=MO-178-AA, ComponentLink1Description="Manufacturer URL", ComponentLink1URL=http://www.analog.com/en/index.html, ComponentLink2Description=Datasheet, ComponentLink2URL=http://www.analog.com/static/imported-files/data_sheets/AD8031_8032.pdf, ComponentLink3Description="Package Specification", ComponentLink3URL=http://www.analog.com/static/imported-files/packages/PKG_PDF/SOT-23(RJ)/RJ_5.pdf, ComponentLink4Description="Reference Circuit", ComponentLink4URL=http://www.analog.com/en/all-operational-amplifiers-op-amps/operational-amplifiers-op-amps/ad8031/products/product.html#product-recommendations, DatasheetVersion="Rev. D", Iq/Amp=900uA, Mounting Technology="Surface Mount", PackageDescription="5-Pin Small Outline Transistor Package, Body 2.9 x 1.6 mm, Pitch 0.95 mm", PackageReference=RJ-5, PackageVersion=121608-A, Packing=Reel, PartNumber=AD8031ARTZ-REEL7, RevisionNote="Reference Circuit URL fixed", Slew Rate=35V/us, Small Signal Bandwidth=80MHz, Supplier 1=Mouser, V Span Max=12V, V Span Min=2.7V
J1 J2: library part 929850-01-17-RA, "Connector 2.54mm", Manufacturer_Name=3M, Supplier Part Number 1=517-929850-01-17-RA, Datasheet Link=http://multimedia.3m.com/mws/media/22500O/3mtm-boardmount-skt-100-100x-100strt-sldr-tails-ts0815.pdf, Height=8.26mm, Manufacturer_Part_Number=929850-01-17-RA, Supplier 1=Mouser
L1: library part 74438336100, "Inductor", Manufacturer_Name="Wurth Elektronik", Supplier Part Number 1=710-74438336100, Datasheet Link=http://katalog.we-online.de/pbs/datasheet/74438336100.pdf, Manufacturer_Part_Number=74438336100, Supplier 1=Mouser
L2: library part 742792901, "SMD EMI Suppression Power Ferrite WE-PF, Z = 2900 Ohm", Supplier Part Number 1=710-742792901, ComponentLink1Description="Manufacturer Link", ComponentLink1URL=http://www.we-online.com, ComponentLink2Description=Datasheet, ComponentLink2URL=http://www.we-online.de/katalog/media/pdf/742792901.pdf, DatasheetVersion="ver 6, Apr-2007", Impedance="2900 Ohm", PackageDescription="Inductor, 2-Leads, Body 12.0 x 12.0 mm", PackageReference=WE-PF, PackageVersion=2007, Supplier 1=Mouser
LED1: library part 150080GS75000, "SMD mono-color Chip LED, WL-SMCW, Green", Color=Green, Manufacturer="Wuerth Elektronik", Supplier Part Number 1=710-150080GS75000, ComponentLink1Description="Manufacturer URL", ComponentLink1URL=http://www.we-online.com, ComponentLink2Description=Datasheet, ComponentLink2URL=http://katalog.we-online.com/led/datasheet/150080GS75000.pdf, PackageReference=0805_A, PartNumber=150080GS75000, Supplier 1=Mouser
M1 M2 M3 M4: library part BSZ070N08LS5ATMA1, "Further performance improvements with best-in-class OptiMOSâ„¢ 5 60V power MOSFET in high performance PQFN 3.3x3.3mm package / MOSFET Diode", Package="TSDSON-8 Infineon Technologies", Supplier Part Number 1=726-BSZ070N08LS5ATMA, Availability=Unavailable, MF="Infineon Technologies", MP=BSZ037N06LS5ATMA1, Price=None, SnapEDA_Link=https://www.snapeda.com/parts/BSZ037N06LS5ATMA1/Infineon%20Technologies/view-part/4422719/?ref=snap, Supplier 1=Mouser
M5 M6 M7 M8: library part M3_Mounting_hole
P1 P2: library part 691313510002, "Serie 313 - 5.08mm Close Horizontal PCB Header WR-TBL, 2 pin", Manufacturer="Wurth Elektronik", Operating Temperature=-40to105degC, Supplier Part Number 1=710-691313510002, Datasheet URL=http://katalog.we-online.de/em/datasheet/6913135100xx.pdf, Gender=Male, Manufacturer URL=http://www.we-online.de, Mounting Technology=THT, Package Reference=691313510002, Packaging=Box, Part Number=691313510002, Pin Number=2, Pitch=5.08mm, Publisher=WurthElektronik, Supplier 1=Mouser
R1: library part CRCW08051K00FKEAC, "Resistor 1K0 Ohm", Supplier Part Number 1=71-CRCW0805-1.0K-E3, Number of Terminations=2, Supplier 1=Mouser
R2 R3 R15 R16 R23 R31: library part CRCW08051K00FKEA, "Resistor 1k Ohm", Supplier Part Number 1=71-CRCW0805-1.0K-E3, Number of Terminations=2, Supplier 1=Mouser
R4: library part CRCW0805100KFKEB, "Resistor 100K Ohm", Supplier Part Number 1=71-CRCW0805100KFKEB, Number of Terminations=2, Supplier 1=Mouser
R5 R6 R17 R18: library part CRCW120610R0FKEA, "RES Thick Film, 10Ω, 1%, 0.25W, 100ppm/°C, 1206 / MOSFET Gate Resistor 10Ohm", Case Code (Imperial)=1206, Case Code (Metric)=3216, Max Operating Temperature=155°C, Max Power Dissipation=250mW, Min Operating Temperature=-55°C, Package Quantity=10, Supplier Part Number 1=541-10.0FDKR-ND, Temperature Coefficient=100ppm/°C, Tolerance=1%, Voltage Rating=200V, Case/Package=1206, Composition="Thick Film", Contact Plating=Tin, Depth=1.6mm, Features="Automotive AEC-Q200", Height=0.55mm, Lead Free="Lead Free", Length=3.2mm, Military Standard=Not, Number of Pins=2, Number of Terminations=2, Packaging="Tape and Reel", Power Rating=250mW, Radiation Hardening=No, Resistance=10R, Supplier 1=Digi-Key, Termination=SMD/SMT, Voltage Rating (DC)=200V, Weight=0.000353oz, Width=0.063inch
R7: library part CRCW08056K80FKEA, "Resistor 6K8 Ohm", Supplier Part Number 1=71-CRCW0805-6.8K-E3, Number of Terminations=2, Supplier 1=Mouser
R8: library part CRCW080575K0FKEB, "Resistor 75K Ohm", Supplier Part Number 1=71-CRCW080575K0FKEB, Number of Terminations=2, Supplier 1=Mouser
R9 R10 R12 R13 R19 R20 R21 R22 R35: library part CRCW080510K0FKEA, "RES Thick Film, 10kΩ, 1%, 0.125W, 100ppm/°C, 0805 / 10k Ohm", Case Code (Imperial)=0805, Case Code (Metric)=2012, Max Operating Temperature=155°C, Min Operating Temperature=-55°C, Package Quantity=5000, Power Rating=125mW, Resistance=10kR, Supplier Part Number 1=71-CRCW0805-10K-E3, Temperature Coefficient=100ppm/°C, Tolerance=1%, Voltage Rating=150V, Case/Package=0805, Composition="Thick Film", Contact Plating=Tin, Depth=1.25mm, Height=0.45mm, Lead Free="Lead Free", Length=2mm, Military Standard=Not, Packaging="Tape and Reel", Radiation Hardening=No, Supplier 1=Mouser, Termination=SMD/SMT, Voltage Rating (DC)=150V, Weight=0.000194oz, Width=1.25mm
R11: library part CRCW08051K30FKEB, "Resistor 1K3 Ohm", Supplier Part Number 1=71-CRCW08051K30FKEB, Number of Terminations=2, Supplier 1=Mouser
R14: library part CRCW080515K0FKEB, "Resistor 15K Ohm", Supplier Part Number 1=71-CRCW080515K0FKEB, Number of Terminations=2, Supplier 1=Mouser
R24: library part ERA-6ARW153V, "High Presicion 15K Ohm", Supplier Part Number 1=667-ERA-6ARW153V, Supplier 1=Mouser
R25: library part ERA-6ARB103V, "High Presition and High reliability 10K Ohm Resistor", Supplier Part Number 1=667-ERA-6ARB103V, Supplier 1=Mouser
R26: library part ERA-6AED153V, "15K Ohm Resistor", Supplier Part Number 1=667-ERA-6AED153V, Supplier 1=Mouser
R27: library part CRCW080510K0FKEB, "High Presicion 10K Ohm", Supplier Part Number 1=26R4046, Supplier 1=Newark
R28 R29: library part CRCW0805470RFKEB, "Resistor 470 Ohm", Supplier Part Number 1=71-CRCW0805470RFKEB, Number of Terminations=2, Supplier 1=Mouser
R30: library part CRCW08051M00FKEA, "RES Thick Film, 1MΩ, 1%, 0.125W, 100ppm/°C, 0805 / 1M Ohm Resistor", Case Code (Imperial)=0805, Case Code (Metric)=2012, Max Operating Temperature=155°C, Min Operating Temperature=-55°C, Package Quantity=5000, Power Rating=125mW, Resistance=1MR, Supplier Part Number 1=71-CRCW08051M00FKEAH, Temperature Coefficient=100ppm/°C, Tolerance=1%, Voltage Rating=150V, Case/Package=0805, Composition="Thick Film", Contact Plating=Tin, Depth=1.25mm, Height=0.45mm, Lead Free="Lead Free", Length=2mm, Military Standard=Not, Mount="Surface Mount", Number of Pins=2, Packaging="Tape and Reel", Radiation Hardening=No, Supplier 1=Mouser, Termination=SMD/SMT, Voltage Rating (DC)=150V, Weight=0.000194oz, Width=1.25mm
R32: library part ERJ-6ENF5622V, "56K Ohm Resistor", Supplier Part Number 1=667-ERJ-6ENF5622V, Supplier 1=Mouser
R33: library part CRCW08056K80FKEA, "Resistor 6.8K Ohm", Supplier Part Number 1=71-CRCW0805-6.8K-E3, Number of Terminations=2, Supplier 1=Mouser
R34: library part CRCW0805100RFKEB, "Resistor 100 Ohm", Supplier Part Number 1=71-CRCW0805100RFKEB, Number of Terminations=2, Supplier 1=Mouser
R36: library part FC4L110R005FER, "Resistor 0R005 5W", Manufacturer_Name=Ohmite, Supplier Part Number 1=588-FC4L110R005FER, Height=0.7mm, Manufacturer_Part_Number=FC4L110R005FER, Supplier 1=Mouser
R37: library part PWR163S-25-3000FE, "Resistor 300 Ohm / 25W", Manufacturer_Name=Bourns, Supplier Part Number 1=652-PWR163S253000FE, Datasheet Link=https://componentsearchengine.com/Datasheets/1/PWR163S-25-3000FE.pdf, Height=2.79mm, Manufacturer_Part_Number=PWR163S-25-3000FE, Supplier 1=Mouser
RT1: library part NTCS0805E3103HMT, "Thermistor 10Kohm B Parameter: 3950k", Manufacturer_Name=Vishay, Supplier Part Number 1=594-NTCS0805E3103HMT, Datasheet Link=http://www.vishay.com/docs/29044/ntcs0805e3t.pdf, Height=0.95mm, Manufacturer_Part_Number=NTCS0805E3103HMT, Supplier 1=Mouser
TP1 TP2 TP3 TP4 TP5 TP6 TP7 TP8 TP9 TP10 TP11 TP12 TP13: library part "Test Point", "Test Point 1mm by 1mm"
U1: library part TS432AILT, "Shunt voltage reference, adjustable, 1.24 to 10V, 0.5% precision, 3-Pin SOT23-3L, Tape and Reel", Supplier Part Number 1=497-TS432AILTCT-ND, ComponentLink1Description="Manufacturer URL", ComponentLink1URL=http://www.st.com, ComponentLink2Description=Datasheet, ComponentLink2URL=http://www.st.com/internet/com/TECHNICAL_RESOURCES/TECHNICAL_LITERATURE/DATASHEET/CD00003202.pdf, DatasheetVersion=Apr-2008, PackageDescription="3-Pin SOT-23 Package 0.95 mm Pitch, 2.4 mm Lead Span", PackageReference=SOT23-3, PackageVersion=2011, Supplier 1=Digi-Key

## Via types
v1: diameter 0.6, hole 0.3, Top Layer to Bottom Layer, 186 vias
v2: diameter 0.6, hole 0.3, Top Layer to Bottom Layer, tented top, 28 vias
v3: diameter 1, hole 0.5, Top Layer to Bottom Layer, 2 vias

## Nets (pads, with @x,y where several pads share a name; then routed paths per layer and width w, separated by ;. In a path a pad name is that pad's centre, name@x,y a point inside that pad or via, vN(x,y) a via of type N, cw(c..) or ccw(c..) an arc to the next point about the centre after c; other vN are vias at no path point)
5V: C8.1 C14.2 C15.2 C16.2 C17.2 C18.2 C23.2 C29.2 C32.2 C33.2 C46.2 C47.2 D1.2 D2.2 IC1.7 IC4.1 IC5.1 IC6.6 IC7.5 J2.1 LED1.2 R7.2 R23.2 TP9.1 | length 149.9
  Top Layer w0.254: IC4.1 9.75,7.56 C29.2 9.49,7.085 11.202,5.373 21.123,5.373 21.5,5.75 ; D2.2 20.281,60 21.522,58.759 21.522,57.916 22.615,56.823 24.435,56.823 24.627,57.015 24.627,57.127 24.95,57.45 IC5.1 24.95,58.037 25.123,58.21 C32.2 27.215,58.21 27.568,58.563 27.568,59.224 27.75,59.406 v1(27.75,59.5) ; C23.2 40.975,50.611 R7.2 41.156,48.519 LED1.2 ; 43.671,38.5 49.975,32.195 49.975,23.888 58.82,15.043 59.243,15.043 C47.2 60.672,14.69 60.893,14.911 60.893,14.956 61.115,15.177 61.985,15.177 62.439,14.723 63.277,14.723 63.45,14.55 IC7.5 ; C17.2@55.4,47.11 58.585,47.11 59.285,47.81 C46.2 59.715,47.81 60.54,48.635 IC6.6
  Top Layer w0.5: D1.2 20.85,7.05 20.85,6.4 21.5,5.75 27,5.75 v1(31,9.75) ; v1(38,47.25) 41,47.25
  Top Layer w1: R23.2 38.5,22.8 J2.1 36.325,25.625 C33.2 36.325,30.325 43.671,37.671 43.671,38.5
  Bottom Layer w0.254: TP9.1 34.123,26.877 34.423,26.877 J2.1
  Bottom Layer w0.5: v1(27.75,59.5) 27.75,58.712 38,48.462 v1(38,47.25) ; v1(31,9.75) 31,20.3 J2.1
"5V In Filtered": C19.2 C20.2 IC1.1 L1.1 R4.2 R8.2
Amp_out: IC6.5 R31.2 | length 34.3
  Top Layer w0.254: R31.2 58.25,18.929 v1(58.25,21) ; v1(59.695,49.873) 59.727,49.905 IC6.5
  Bottom Layer w0.254: v1(58.25,21) 60.125,22.875 60.125,37.063 59.695,37.493 v1(59.695,49.873)
"Current ADC Output": C50.2 J1.16 R34.1 | length 13.5
  Top Layer w0.254: R34.1 70.595,13.43 C50.2 72.334,13.215 74.1,11.45 J1.16
FeedBack: C23.1 IC1.6 R7.1 R11.2 | length 9.2
  Top Layer w0.254: R7.1 39.025,50.2 R11.2 39.25,50.225 40.032,51.007 40.032,51.503 40.839,52.31 C23.1 41.407,52.663 42.211,52.663 43.008,53.46 IC1.6
GND: C8.2 C10.1 C11.1 C12.1 C13.1 C14.1 C15.1 C16.1 C17.1 C18.1 C19.1 C20.1 C21.1 C22.1 C28.1 C29.1 C30.1 C31.1 C32.1 C33.1 C34.2 C35.2 C36.2 C37.2 C38.1 C39.1 C41.1 C42.1 C44.1 C45.1 C46.1 C47.1 C48.1 C49.1 C50.1 IC1.4 IC1.8 IC4.2 IC5.2 IC6.2 IC7.2 J1.1 M3.1-2-3 M4.1-2-3 P2.1 R1.2 R11.1 R14.1 R19.1 R20.1 R21.2 R22.2 R27.1 R32.1 R35.2 R37.1 RT1.2 TP7.1 TP8.1 U1.3 | length 81.1
  Top Layer w0.254: v1(11.3,6.377) 11.3,7.11 10.757,7.653 10.757,8.893 IC4.2 10.7,9.25 11.023,9.573 11.023,9.685 11.215,9.877 12.498,9.877 12.985,9.39 C30.1 13.415,9.39 13.768,9.037 13.768,8.207 14.675,7.3 R19.1 14.675,7.1 15.775,6 v1(16,6) ; v1(13,12.75) 13.075,12.825 R21.2 ; C31.1 20.715,57.81 22.156,56.369 24.623,56.369 24.844,56.59 C32.1 28.59,56.59 28.645,56.645 28.762,56.645 29.156,56.25 29.156,56.244 v1@29.2,56.2 ; IC5.2 24,58.05 24.323,58.373 24.323,58.485 24.736,58.898 24.973,58.898 25.975,59.9 R20.1 ; RT1.2 27.35,20.1 v1(31.5,24.25) ; R22.2 28.525,54.975 v1(29.25,54.25) ; v1(32.783,17.544) 33.022,17.783 33.022,18.474 33.373,18.825 C41.1 ; v1(34,14.75) 34,14.191 34.173,14.018 U1.3 ; v1(34.5,44.75) 34.911,44.75 35.631,45.47 R1.2 ; v1(38.5,9.5) R27.1 ; C33.1 v1(39.988,28.512) v1@40,28.5 ; C28.1 41.407,55.663 42.441,55.663 42.778,56 IC1.4 ; v1@58.25,16.5 58.44,16.31 C47.1 60.672,16.31 60.893,16.089 60.893,16.044 61.115,15.823 61.985,15.823 62.177,16.015 62.177,16.127 62.5,16.45 IC7.2 ; v1(58.841,45.341) 58.932,45.432 58.932,45.837 59.285,46.19 C46.1 ; v1(61.644,53.637) 61.644,52.966 C45.1 ; R35.2 64.57,12.18 v1(65,11.75) ; C49.1 67.5,18.5 67.75,18.75 v1(68,18.75) ; IC6.2 68.615,47.365 v1(68.75,47.5) ; v1(67.25,54) 67.3,53.95 C44.1 ; v1(68.25,7.5) 68.474,7.276 68.474,6.063 C42.1 ; v1(72.25,20.25) 72.475,20.475 R32.1 ; C48.1 73.825,14.749 ; C50.1 73.825,13.56 73.825,14.749 ; v1(75.25,14.25) 74.751,14.749 73.825,14.749
  Top Layer w0.5: C18.1 43.176,46.736 43.25,46.661 v3(43.25,45.25) ; IC1.4 IC1.8
  Top Layer w1: v3(34.5,39.5) 37.2,39.5 C8.2
  Bottom Layer w0.254: TP8.1 v1(29.25,52)
  other v1: 0.75,9 27,10.5 0.75,15 58.345,16.405 0.75,32.25 29.25,41.75 29.25,43.25 29.25,45 29.25,47 0.75,47.75 29.25,48.75 29.25,50.25 29.25,56 33.25,57.75 29.25,58.75 33.25,59.5 0.75,60.5 33.25,61 29.25,61.25 33.25,62.5 29.25,63.75 33.25,63.75 33.25,65 35,65 83,70.5
  other v2: 48.705,54.2 49.905,54.2 51.105,54.2 52.305,54.2 53.505,54.2 54.705,54.2 55.905,54.2 48.705,55.4 49.905,55.4 51.105,55.4 52.305,55.4 53.505,55.4 54.705,55.4 55.905,55.4 48.705,56.6 49.905,56.6 51.105,56.6 52.305,56.6 53.505,56.6 54.705,56.6 55.905,56.6 48.705,57.8 49.905,57.8 51.105,57.8 52.305,57.8 53.505,57.8 54.705,57.8 55.905,57.8
In+: R28.2 R36.3 TP13.1 | length 5.3
  Top Layer w0.254: v1(60.5,55) R28.2@63.225,55 ; R36.3 62.673,56.402 62.673,55.552 R28.2@63.225,55 ; R28.2 63.475,55 R28.2@63.225,55
In-: R29.2 R36.4 TP12.1 | length 5.6
  Top Layer w0.254: R29.2 65.629,55 R29.2@65.804,55 ; R36.4 66.127,56.402 66.127,55.323 R29.2@65.804,55 ; v1(69,55) R29.2@65.804,55
NetC24_2: C24.2 D1.1 IC2.1 | length 4.7
  Top Layer w0.254: C24.2 18.2,7.623 18.623,7.2 D1.1 19.25,7.2 19.673,7.623 19.673,8.073 20.25,8.65 IC2.1
NetC25_2: C25.2 IC2.4 R2.1 | length 4.1
  Top Layer w0.254: IC2.4 24.56,11.45 C25.2 24.9,11.51 R2.1
NetC26_2: C26.2 IC3.4 R3.1 | length 3.5
  Top Layer w0.254: C26.2 R3.1 11.325,55.25 IC3.4
NetC27_2: C27.2 D2.1 IC3.1 | length 9.1
  Top Layer w0.254: IC3.1 15.925,57.75 C27.2@16.985,56.69 ; v1(15.75,56.5) 15.844,56.5 16.034,56.69 C27.2@16.985,56.69 ; v1(16.25,60) D2.1 ; C27.2 C27.2@16.985,56.69
  Bottom Layer w0.254: v1(15.75,56.5) 15.75,59.406 16.25,59.906 v1(16.25,60)
NetC28_2: C28.2 IC1.5 | length 4.4
  Top Layer w0.254: C28.2 42.249,53.69 42.971,54.412 44.682,54.412 IC1.5
NetC30_2: C30.2 IC4.4 R15.1 | length 3.5
  Top Layer w0.254: IC4.4 12.545,11.45 12.985,11.01 C30.2 14.735,11.01 R15.1
NetC31_2: C31.2 IC5.4 R16.1 | length 3.9
  Top Layer w0.254: C31.2 R16.1 22.877,54.975 23.05,55.148 IC5.4
NetC40_2: C40.2 R24.1 R27.2 TP11.1 U1.1 | length 16.4
  Top Layer w0.254: C40.2 33.868,16.618 33,15.75 33,12.75 34,11.75 35.5,11.75 35.827,12.077 35.827,12.895 36,13.068 U1.1 38.325,13.068 R27.2 ; R24.1 R27.2 ; v1(40.5,13) 38.607,13 R27.2
NetC43_1: C43.1 C44.2 IC6.1 R29.1 | length 10.2
  Top Layer w0.254: R29.1 65.604,51.894 C43.1 C43.1@65.31,51.543 ; IC6.1 66.775,46.095 65.31,47.56 C43.1@65.31,51.543 ; C44.2 65.663,51.19 C43.1@65.31,51.543
NetC43_2: C43.2 C45.2 IC6.8 R28.1 | length 10.1
  Top Layer w0.254: IC6.8 62.225,46.095 63.69,47.56 C43.2@63.69,51.543 ; C45.2 63.337,51.19 C43.2@63.69,51.543 ; R28.1 63.5,51.79 C43.2 C43.2@63.69,51.543
NetC49_2: C49.2 R31.1 R33.2 | length 6.6
  Top Layer w0.254: R31.1 59.975,18.954 60.777,19.756 62.19,19.756 62.431,19.514 62.431,18.946 62.673,18.704 R33.2 63.734,18.5 C49.2
NetC51_1: C51.1 IC7.4 R26.1 R35.1 | length 9.3
  Top Layer w0.254: R35.1 61.525,12.28 R35.1@61.55,12.305 ; IC7.4 R35.1@61.55,12.305 ; R26.1 67.424,13.95 C51.1 64.413,13.95 63.851,13.389 62.634,13.389 R35.1@61.55,12.305
NetIC2_3: IC2.3 R9.2 | length 2.1
  Top Layer w0.254: IC2.3 22.15,7.775 22.725,7.2 R9.2
NetIC2_5: IC2.5 R5.1 | length 4.2
  Top Layer w0.254: IC2.5 20.25,11.75 20.423,11.923 21,11.923 23.026,13.949 R5.1
NetIC3_3: IC3.3 R10.2 | length 2.3
  Top Layer w0.254: R10.2 13.05,59.975 IC3.3
NetIC3_5: IC3.5 R6.1 | length 4.5
  Top Layer w0.254: R6.1 13.025,52.351 13.025,53.025 14.95,54.95 IC3.5
NetIC4_3: IC4.3 R19.2 | length 2.2
  Top Layer w0.254: IC4.3 11.65,8.65 12.177,8.123 12.177,7.748 R19.2
NetIC4_5: IC4.5 R17.1 | length 3.1
  Top Layer w0.254: R17.1 9.442,13.649 9.442,12.815 9.75,12.506 IC4.5
NetIC5_3: IC5.3 R20.2 | length 2.8
  Top Layer w0.254: IC5.3 23.223,57.923 23.223,58.335 23.565,58.677 23.858,58.677 24.025,58.844 R20.2
NetIC5_5: IC5.5 R18.1 | length 4.6
  Top Layer w0.254: R18.1 22.825,52.351 22.825,52.825 24.95,54.95 IC5.5
NetIC7_3: IC7.3 R33.1 | length 2
  Top Layer w0.254: IC7.3 61.55,18.675 R33.1
NetLED1_1: LED1.1 R1.1 | length 1.5
  Top Layer w0.254: R1.1 LED1.1
NetM1_4: M1.4 R6.2 R13.1 TP2.1 | length 9
  Top Layer w0.254: M1.4 15.45,51.724 R6.2 15.526,53.501 17.2,55.175 R13.1
  other v1: 15.5,49
NetM2_4: M2.4 R5.2 R12.1 TP1.1 | length 7.5
  Top Layer w0.254: R12.1 R12.1 R12.1@18.427,14.2 ; M2.4 18.75,14.523 R12.1@18.427,14.2 ; R5.2 R12.1@18.427,14.2
  other v1: 18.75,17.75
NetM3_4: M3.4 R18.2 R22.1 TP6.1 | length 8.9
  Top Layer w0.254: M3.4 25.45,49 ; v1(27,48.5) 26.5,49 25.45,49 ; R22.1 26.452,52.477 25.877,52.477 25.326,51.926 R18.2 25.45,51.676 25.45,49
NetM4_4: M4.4 R17.2 R21.1 TP5.1 | length 8.7
  Top Layer w0.254: M4.4 10.25,16.5 v1(10.75,16) 11.427,15.323 11.427,14.715 R17.2 13.009,14.2 13.309,14.5 13.925,14.5 R21.1
"Op-Amp Out": C51.2 IC7.1 R26.2 R34.2 | length 7.6
  Top Layer w0.254: IC7.1 64.335,16.7 65.464,15.57 C51.2 67.754,15.57 R26.2 R34.2
P+: C10.2 C11.2 C12.2 C13.2 C21.2 C22.2 C34.1 C35.1 C36.1 L1.2 M1.5-6-7-8 M2.5-6-7-8 R2.2 R3.2 R36.2 | length 2.5
  Top Layer w0.254: 24.5,17 24.9,16.6
  Top Layer w0.4: R2.2 24.9,16.6
  other v1: 22.5,17 23.75,17 3.75,17.75 5,17.75 6.25,17.75 22.5,18.25 23.75,18.25 22.5,19.75 23.75,19.75 20.025,19.925 20.9,19.925 20.025,20.7 20.875,20.725 22.5,21 23.75,21 25,21.25 26.25,21.25 20.85,21.475 20.025,21.5 23.75,22.25 25,22.25 26.25,22.25 22.5,22.5 22.5,23.5 23.75,23.5 25,23.5 26.25,23.5 14.175,45.2 13.35,45.225 13.325,45.975 14.175,46 4.25,46.25 5.5,46.25 6.75,46.25 8,46.25 9.25,46.25 10.5,46.25 13.3,46.775 14.175,46.775 4.25,47.25 5.5,47.25 6.75,47.25 8,47.25 9.25,47.25 10.5,47.25 4.25,48.25 5.5,48.25 6.75,48.25 8,48.25 9.25,48.25 10.5,48.25
P-: C37.1 L2.1 R36.1
"Power In 1": C1.1 C2.1 C4.1 C6.1 P1.1
"Rectifier Vin 1": C3.1 C5.1 C7.1 C9.1 C24.1 C25.1 IC2.2 M2.1-2-3 M4.5-6-7-8 P1.2 R9.1 R12.2 R15.2 TP3.1 | length 23.2
  Top Layer w0.254: R15.2 15.15,9.225 16.435,10.51 C24.1 R12.2 18.3,12.025 19.802,10.523 20.039,10.523 21.027,9.535 21.027,9.123 21.073,9.123 21.373,9.423 21.373,9.535 21.715,9.877 22.83,9.877 23.017,9.69 C25.1 24.7,7.125 R9.1 ; 16.25,17.25 16.435,17.065
  Top Layer w0.5: 16.435,10.51 16.435,17.065
  other v1: 11.525,19.925 12.4,19.925 11.525,20.7 12.375,20.725 12.35,21.475 11.525,21.5 13.842,25.746
"Rectifier Vin 2": C1.2 C2.2 C3.2 C4.2 C5.2 C6.2 C7.2 C9.2 C26.1 C27.1 IC3.2 M1.1-2-3 M3.5-6-7-8 R10.1 R13.2 R16.2 TP4.1 | length 18.6
  Top Layer w0.254: C26.1 11.215,58.51 12.091,57.634 12.091,57.346 12.615,56.823 13.485,56.823 13.827,57.165 13.827,57.577 IC3.2 14,58.925 R10.1@14.975,59.9 ; R10.1 R10.1@14.975,59.9 ; 18.75,52.75 18.75,56.975 17.415,58.31 C27.1 16.847,58.663 16.212,58.663 R10.1@14.975,59.9
  Bottom Layer w0.254: v1(20.75,43.25) v1(22,43.25) ; 22.5,43.25 TP4.1
  other v1: 13,33 14.25,33 15.5,33 16.75,33 18,33 19.5,33 21,33 22.25,33 23.75,33 25.25,33 27,33 9.5,41.75 11.25,41.75 13,41.75 15.25,41.75 17.25,41.75 19,41.75 20.75,41.75 22,41.75 9.5,43.25 11.25,43.25 13,43.25 15.25,43.25 17.25,43.25 19,43.25 17.25,44.75 19,44.75 20.75,44.75 22,44.75 24.175,45.2 23.35,45.225 23.325,45.975 24.175,46 23.3,46.775 24.175,46.775
Ron: IC1.2 R4.1 | length 4.1
  Top Layer w0.254: R4.1 42.548,58.025 42.745,58.222 44.682,58.222 IC1.2
"Temp ADC": C42.2 J1.15 R25.1 RT1.1 | length 61.7
  Top Layer w0.254: RT1.1 27.325,17.9 29.898,20.473 ; R25.1 30.9,21.475 29.898,20.473 ; J1.15 71.526,2.534 71.526,5.361 C42.2 71.175,6.012 70.824,6.363 70.273,6.363 67.955,8.682 34.318,8.682 29.898,13.102 29.898,20.473
UVLO: IC1.3 R8.1 R14.2 | length 9.3
  Top Layer w0.254: R8.1 38.994,55.481 R14.2 39.25,55.475 40.998,57.223 42.274,57.223 42.321,57.27 IC1.3
Vout: C38.2 C39.2 L2.2 P2.2 R30.2 R37.2 | length 21.9
  Top Layer w0.254: v1(75.75,22.5) 76,22.25 R30.2
  Bottom Layer w0.254: P2.2 76.527,39.513 76.527,32.43 75.375,31.278 75.375,22.968 75.75,22.594 v1(75.75,22.5)
"Vout ADC": C48.2 J1.17 R30.1 R32.2 | length 18.5
  Top Layer w0.254: R32.2 R30.1 76.175,18.35 C48.2 76.526,15.587 76.526,2.614 J1.17
"Vref 3.1V": C40.1 C41.2 R23.1 R24.2 R25.2 TP10.1 U1.2 | length 16.7
  Top Layer w0.254: R25.2 32.023,19.525 33.022,20.524 33.022,20.824 33.373,21.175 C41.2 33.973,21.175 34.324,20.824 34.324,20.248 36.81,17.762 C40.1 ; U1.2 36.45,16.043 36.81,16.403 C40.1 ; v1(40.5,18) 38.643,18 R23.1 R24.2 36.835,16.593 C40.1
pads on no net: IC6.3 IC6.4 IC6.7 J1.2 J1.3 J1.4 J1.5 J1.6 J1.7 J1.8 J1.9 J1.10 J1.11 J1.12 J1.13 J1.14 J2.2 J2.3 J2.4 J2.5 J2.6 J2.7 J2.8 J2.9 J2.10 J2.11 J2.12 J2.13 J2.14 J2.15 J2.16 J2.17 M5.1 M6.1 M7.1 M8.1 R37.3
copper on no net:
  other v1: 51.747,34.96 53.247,34.96 54.747,34.96 56.247,34.96 57.747,34.96 59.047,34.96 51.747,36.46 53.247,36.46 54.747,36.46 56.247,36.46 57.747,36.46 59.047,36.46 51.747,38.46 53.247,38.46 54.747,38.46 56.247,38.46 57.747,38.46 59.047,38.46 51.747,40.46 53.247,40.46 54.747,40.46 56.247,40.46 57.747,40.46 59.047,40.46 51.747,41.96 53.247,41.96 54.747,41.96 56.247,41.96 57.747,41.96 59.047,41.96

## Polygon pours and split planes (outlines as drawn)
5V on Top Layer "5V_L01_P021" (solid, remove dead copper, pour order 21): 46.75,52.75 46.75,51 44.25,51 44.25,48.75 44.5,48.75 45,48.25 57.5,48.25 57.5,45.25 57.25,45 46.25,45 46.25,37.5 41.25,37.5 41.25,44.25 40.5,45 40.5,51.25 41.75,51.25 43.25,52.75
P+ on Top Layer "P+_L01_P010" (solid, remove dead copper, pour order 10): 27.5,25 27.5,16.25 19.5,16.25 19.25,16.5 19.25,25
GND on Top Layer "GND_L01_P024" (solid, remove dead copper, pour order 24): 45.5,66.25 31.25,66.25 31.25,51.5 39.787,51.5 40.032,51.255 40.032,64.25 45.5,64.25
GND on Top Layer "GND_L01_P023" (solid, remove dead copper, pour order 23): 58,49 58,63.75 50.25,63.75 50.25,61.25 47.75,58.75 47.75,51 44.75,51 44.5,50.75 44.5,49
GND on Top Layer "GND_L01_P022" (solid, remove dead copper, pour order 22): 24.95,46.495 24.955,46.5 26.25,46.5 26.25,50.5 28,52.25 28,59.25 25.25,59.25 25.25,66.25 30,66.25 30,41 25.25,41 24.95,41.3
"5V In Filtered" on Top Layer "5V_IN_FILTERED_L01_P020" (solid, remove dead copper, pour order 20): 45.5,66.25 48,66.25 48,59.25 37.5,59.25 37.5,63.75 45.5,63.75
P+ on Top Layer "P+_L01_P019" (solid, remove dead copper, pour order 19): 48.25,66.75 48.25,62 50,62 50.25,62.25 50.25,64 58.75,64 58.75,66.75
GND on Top Layer "GND_L01_P016" (solid, remove dead copper, pour order 16): 2.75,14.75 7.25,14.75 7.25,5 27.5,5 27.5,0 0,0 0,80 85,80 85,72.5 26.25,72.5 21.25,67.5 8,67.5 8,21.25 2.75,21.25
no net on Top Layer "NONET_L01_P015" (solid, remove dead copper, pour order 15): 2.75,15.25
GND on Top Layer "GND_L01_P014" (solid, remove dead copper, pour order 14): 10.75,20.205 10.705,20.25 2.75,20.25 2.75,43.75 11,43.75 10.75,43.5
P+ on Top Layer "P+_L01_P013" (solid, remove dead copper, pour order 13): 8.25,44.25 15,44.25 15,50 11.75,50 11.75,54.25 8.25,54.25
P+ on Top Layer "P+_L01_P012" (solid, remove dead copper, pour order 12): 3.5,50.75 8.25,50.75 8.25,43.75 3.5,43.75
P+ on Top Layer "P+_L01_P011" (solid, remove dead copper, pour order 11): 2.75,20 7.25,20 7.25,15.5 2.75,15.5
"Rectifier Vin 2" on Top Layer "RECTIFIER_VIN_2_L01_P009" (solid, remove dead copper, pour order 9): 16.5,54 21.25,54 21.25,49.5 24.75,49.5 24.75,41 8.75,41 8.75,44 14.25,44 14.95,44.7 14.95,46.495 16.495,46.495 16.5,46.5
"Rectifier Vin 1" on Top Layer "RECTIFIER_VIN_1_L01_P008" (solid, remove dead copper, pour order 8): 7.5,33 11.5,33 11.5,29.5 12.25,28.75 25,28.75 25,25 24.75,25.25 25,25 20,25 20,23 19.25,22.25 19.25,20.205 17.705,20.205 17.5,20 17.5,16.25 11.25,16.25 11,16.5 11,23.5 10.25,23.5 7.5,26.25
"Rectifier Vin 2" on Top Layer "RECTIFIER_VIN_2_L01_P006" (solid, remove dead copper, pour order 6): 28.75,37.25 12.75,37.25 12.75,37 12.25,36.5 12.25,29.5 28.75,29.5
"Power In 1" on Top Layer "POWER_IN_1_L01_P005" (solid, remove dead copper, pour order 5): 11,39.75 12,40.75 28.75,40.75 28.75,37.5 12.75,37.5 11.5,36.25 11.5,33.75 7.5,33.75 7.5,39.75
P+ on Top Layer "P+_L01_P004" (solid, remove dead copper, pour order 4): 22,72.5 63.25,72.5 63.25,58.75 58.75,58.75 58.75,66.75 22,66.75
P- on Top Layer "P-_L01_P003" (solid, remove dead copper, pour order 3): 65.75,58.75 65.75,72.5 85,72.5 85,61.25 68.75,61.25 68.75,58.75
GND on Top Layer "GND_L01_P002" (solid, remove dead copper, pour order 2): 61,37.5 85,37.5 85,31.25 61,31.25
no net on Top Layer "NONET_L01_P001" (solid, remove dead copper, pour order 1): 85,37.5
Vout on Top Layer "VOUT_L01_P000" (solid, remove dead copper, pour order 0): 70,56.25 85,56.25 85,38.75 72.5,38.75 72.25,38.5 61,38.5 61,43.75 70,43.75
GND on Bottom Layer "GND_L04_P025" (solid, remove dead copper, pour order 25): 85,72.75 85,80 0,80 0,0 27.5,0 27.5,72.75
GND on Bottom Layer "GND_L04_P027" (solid, remove dead copper, pour order 27): 85,72.5 85,0 28.75,0 28.75,72.25 29,72.5
P+ on Bottom Layer "P+_L04_P018" (solid, remove dead copper, pour order 18): 28.75,15.5 28.75,28.75 30,30 30,66.75 46.25,66.75 46.25,72.5 8,72.5 8,51.25 7.75,51 3.5,51 3.5,20.75 2.75,20 2.75,15.5
"Rectifier Vin 2" on Bottom Layer "RECTIFIER_VIN_2_L04_P017" (solid, remove dead copper, pour order 17): 22.5,29.5 22.5,45.75 22.25,46 15,46 15,43.25 13,41.25 7.5,41.25 7.5,29.5
GND on Ground 1 (split plane): 84.49,31.352 61.102,31.352 61.102,37.398 62.5,37.398 62.539,37.406 62.572,37.428 62.594,37.461 62.602,37.5 62.594,37.539 62.572,37.572 62.539,37.594 62.5,37.602 61,37.602 60.961,37.594 60.928,37.572 60.906,37.539 60.898,37.5 60.898,31.25 60.906,31.211 60.928,31.178 60.961,31.156 61,31.148 84.49,31.148 84.49,0.51 30.102,0.51 30.102,1.25 30.102,13.75 30.102,28.708 31.322,29.928 31.344,29.961 31.352,30 31.352,66.148 58.648,66.148 58.648,61.5 58.648,58.25 58.648,58.127 58.656,58.088 58.678,58.054 58.711,58.032 58.75,58.025 58.789,58.032 58.812,58.048 58.834,58.032 58.873,58.025 69.831,58.025 69.898,57.958 69.898,43.852 61,43.852 60.961,43.844 60.928,43.822 60.906,43.789 60.898,43.75 60.898,39.25 60.906,39.211 60.928,39.178 60.961,39.156 61,39.148 62.5,39.148 62.539,39.156 62.572,39.178 62.594,39.211 62.602,39.25 62.594,39.289 62.572,39.322 62.539,39.344 62.5,39.352 61.102,39.352 61.102,43.648 70,43.648 70.039,43.656 70.072,43.678 70.094,43.711 70.102,43.75 70.102,58 70.094,58.039 70.072,58.072 69.946,58.199 69.912,58.221 69.873,58.228 58.916,58.228 58.852,58.292 58.852,66.25 58.844,66.289 58.822,66.322 58.789,66.344 58.75,66.352 31.25,66.352 31.211,66.344 31.178,66.322 31.156,66.289 31.148,66.25 31.148,30.042 29.928,28.822 29.906,28.789 29.898,28.75 29.898,13.75 29.898,1.25 29.898,0.51 0.51,0.51 0.51,79.49 84.49,79.49
P+ on Ground 1 (split plane): 27.398,16.352 19.602,16.352 19.602,24.898 27.398,24.898
P+ on Ground 1 (split plane): 10.913,45.867 3.617,45.867 3.617,48.648 10.913,48.648